# EAGLE board J005904_miniBCS-4 (EAGLE 7.7.0), part 1 of 2
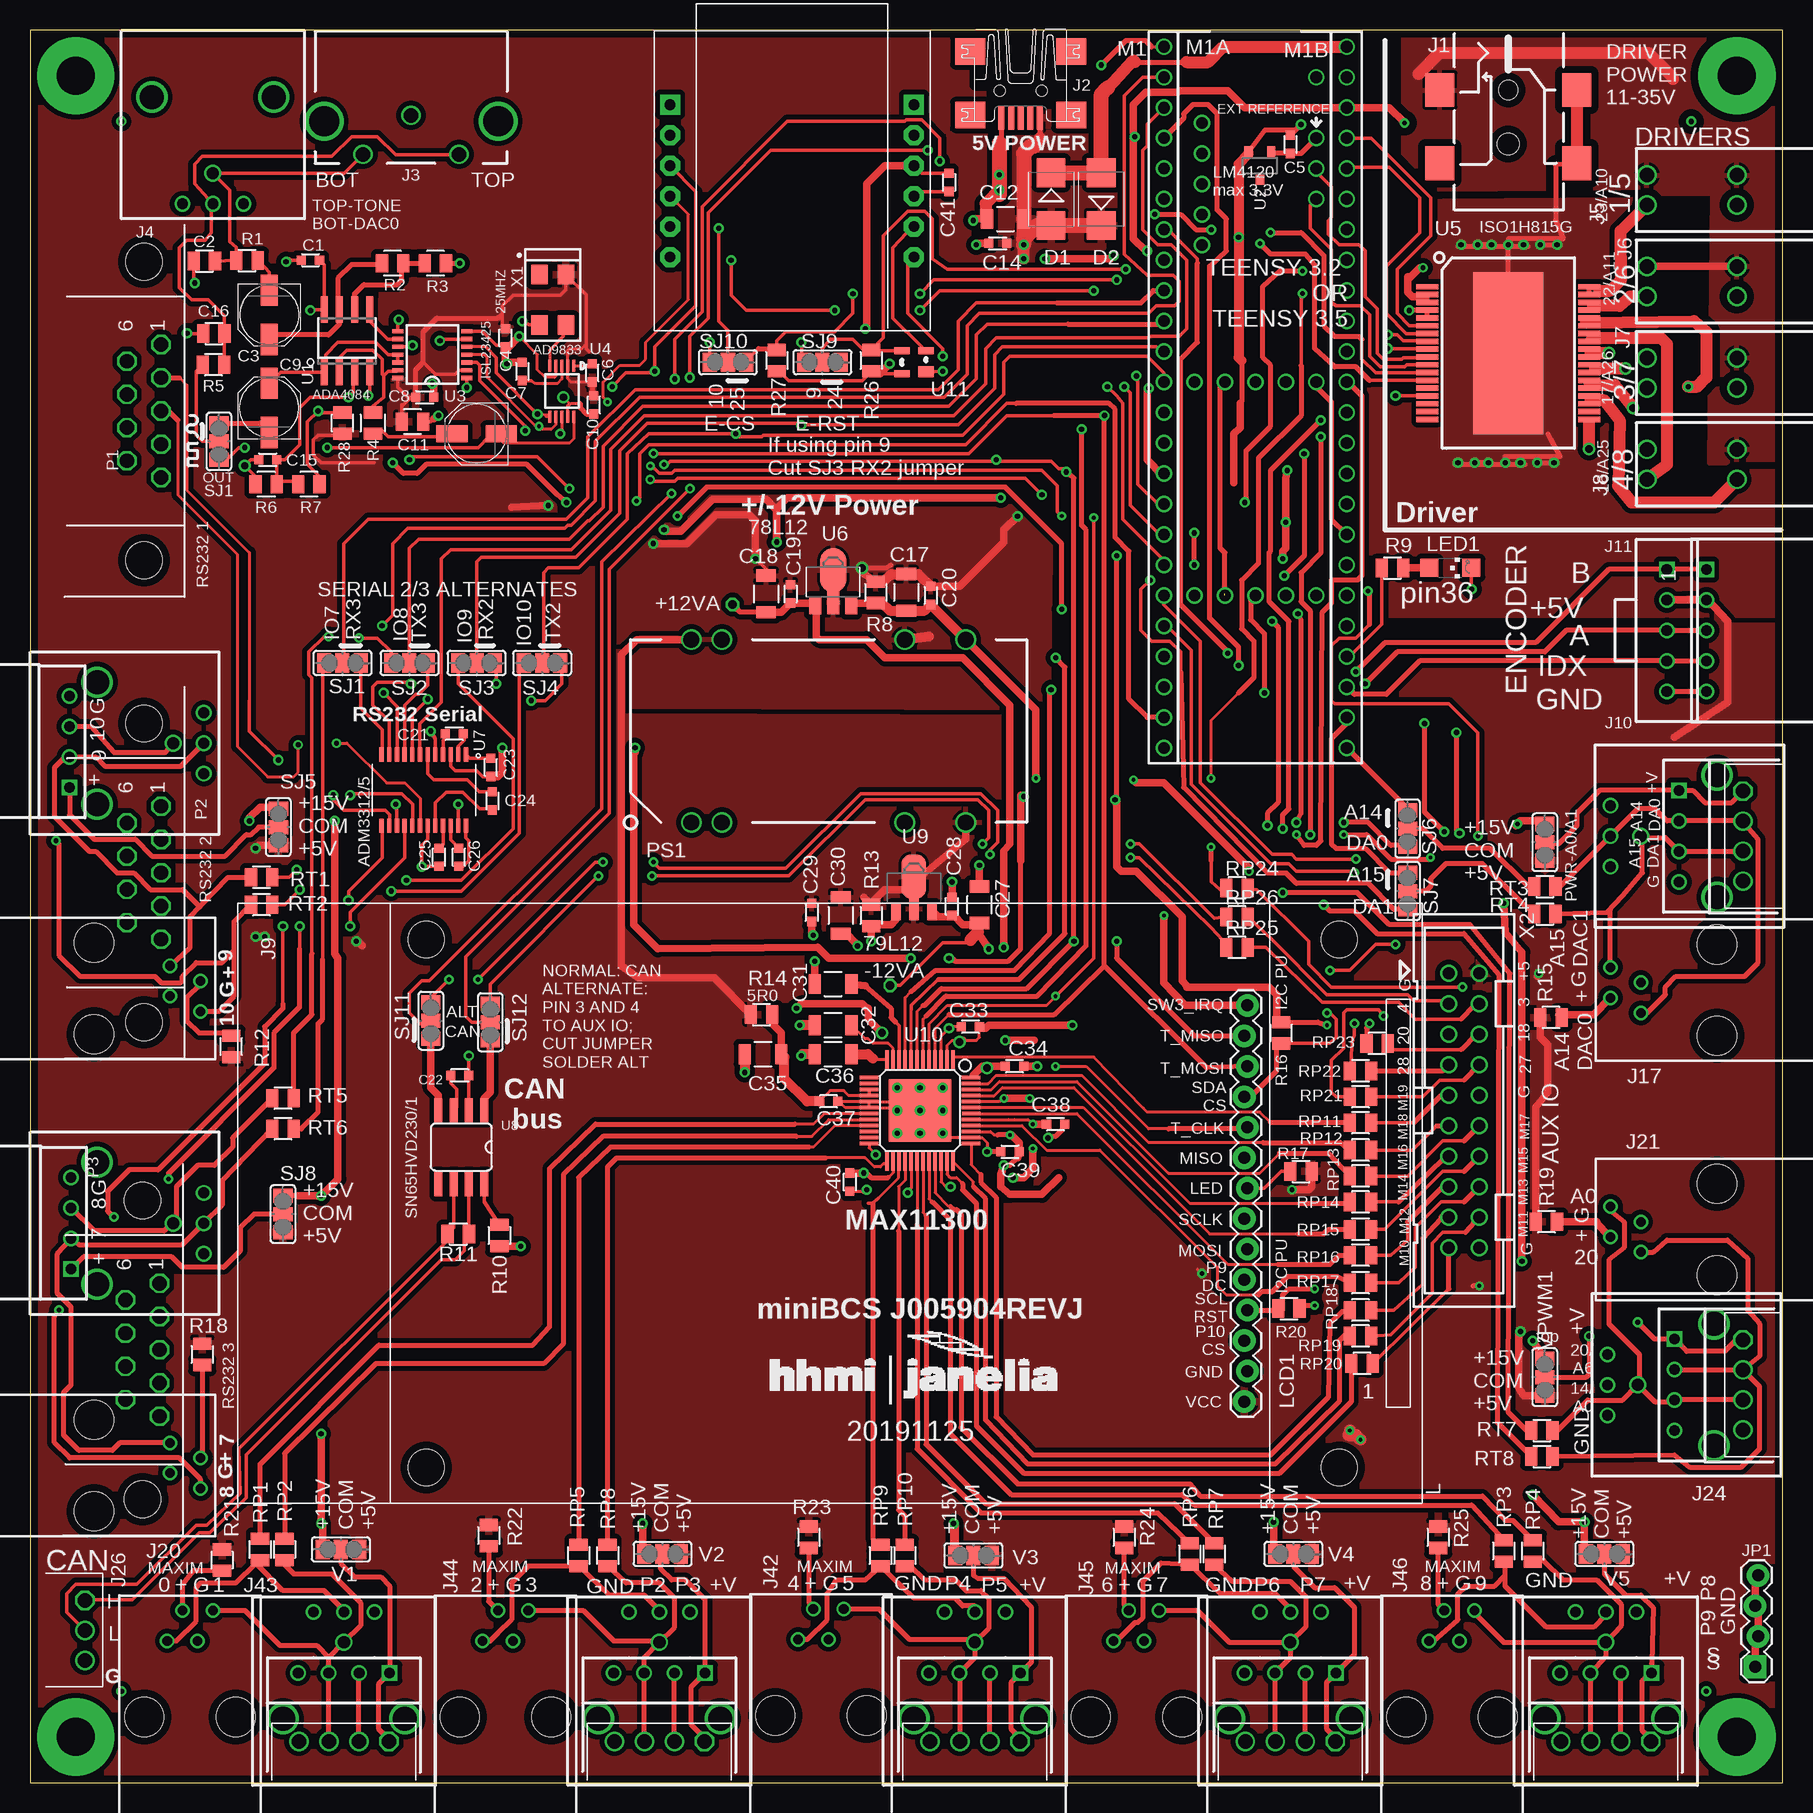
[diagram p0: board, top side]
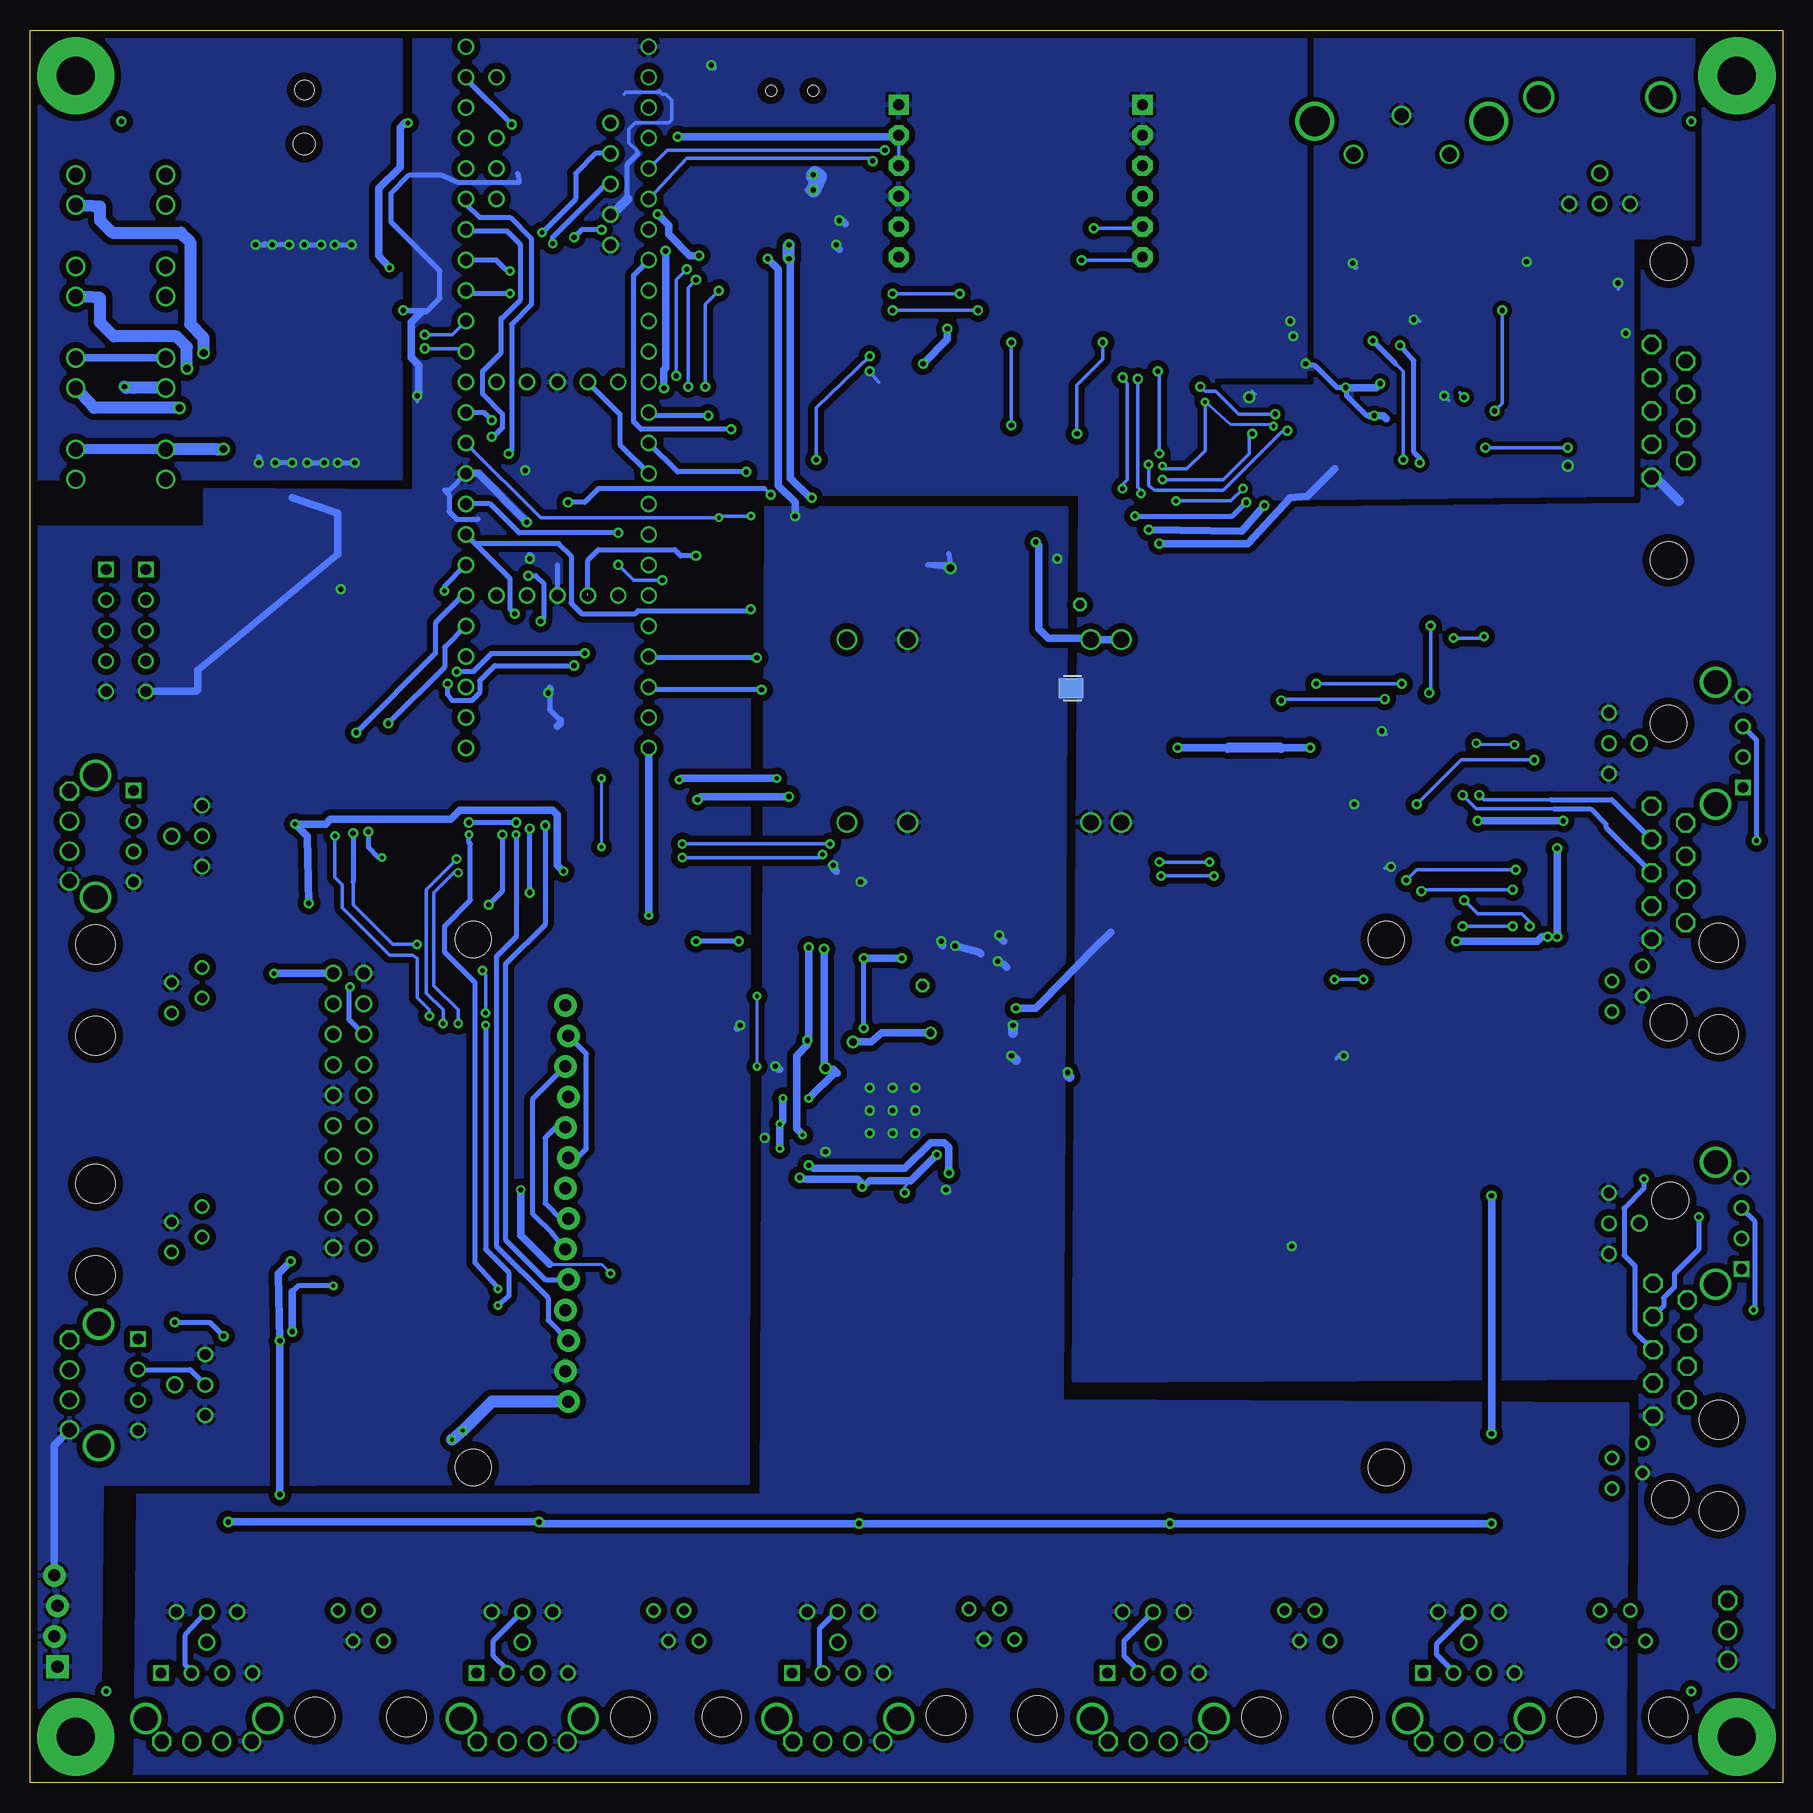
[diagram p1: board, bottom side, seen from below]

Size 146.05 x 146.05 mm. Coordinates in mm from the lower left corner, seen from the top.
Outline: 0,0 146.05,0 146.05,146.05 0,146.05 0,0
Copper layers (1*16): Top 0.035mm / dielectric 1.5mm / Bottom 0.035mm
Design rules "default *": minimum track width 8mil, minimum drill 12mil, track to track 8mil, track to pad 7mil, pad to pad 7mil, via to via 8mil, smd to smd 7mil, copper to edge 25mil, drill to drill 8mil, minimum pad ring 8mil, minimum via ring 8mil, stop-mask expansion 4mil, vias tented up to drill 25mil, thermal gap 10mil
Net classes: 1 power: width 0.254 mm

## Footprints (pad centres in the part's own frame; a part is rotated, then mirrored left to right if it is on the bottom)
0603S = smd 0.762 x 0.762: 1 -0.762,0; 2 0.762,0
0805S = smd 1.016 x 1.524: 1 -0.889,0; 2 0.889,0
PANASONIC_C = smd 2.6 x 1.4: + 2.05,0; - -2.05,0
1206S = smd 1.016 x 1.651: 1 -1.524,0; 2 1.524,0
SMB = smd 2.4 x 2.4: A 2.2,0; C -2.2,0
FIDUCIAL_VIA = drill 0.432: P$1 0,0
WIZ820IO = drill 0.9 pad 1.676 square: J1.1 -10.16,6.35; J2.1 10.16,6.35 | drill 0.9 pad 1.676 octagon: J1.2 -10.16,3.81; J1.3 -10.16,1.27; J1.4 -10.16,-1.27; J1.5 -10.16,-3.81; J1.6 -10.16,-6.35; J2.2 10.16,3.81; J2.3 10.16,1.27; J2.4 10.16,-1.27; J2.5 10.16,-3.81; J2.6 10.16,-6.35
PJ-002 = smd 2.8 x 2.4: 1A 5,5.7; 1B 11.1,5.7; 2 5,-5.7; 3 11.1,-5.7 | hole 1.6: 5,0 | hole 1.8: 9.5,0
UX60-MB-5ST = smd 2 x 0.5: 1 2.25,1.6; 2 2.25,0.8; 3 2.25,0; 4 2.25,-0.8; 5 2.25,-1.6 | smd 2.2 x 2.5: M1 -3.3,-4.2; M2 -3.3,4.2; M3 2,4.2; M4 2,-4.2 | hole 0.9: 0,-1.75; 0,1.75
RCJ-22XX = drill 1.2: 1 0,0; 2 -4,-3.25; 3 4,-3.25 | drill 2.5: A -7.25,-0.5; B 7.25,-0.5
DUAL-BNC = drill 1.016: P$1 0,0 | drill 0.889: P$2 2.54,0; P$3 2.54,2.54; P$4 2.54,-2.54 | drill 2.007: P$5 -6.35,5.08; P$6 -6.35,-5.08
1894804 = drill 1.2: 1 -1.25,0; 2 1.25,0; 3 -1.25,7.5; 4 1.25,7.5
0432024101 = drill 0.8: 1 -1.9,14.35; 2 -0.64,16.89; 3 0.63,14.35; 4 1.9,16.89 | hole 3.25: -3.81,8; 3.81,8
AMPMODU-5 = drill 0.889 square: 1 -5.08,0 | drill 0.889: 2 -2.54,0; 3 0,0; 4 2.54,0; 5 5.08,0
103635-4 = drill 0.889 square: 1 -5.08,0 | drill 0.889: 2 -2.54,0; 3 0,0; 4 2.54,0; 5 5.08,0
AMPMODU-4-RA = drill 0.889 square: 1 -3.81,0 | drill 0.889: 2 -1.27,0; 3 1.27,0; 4 3.81,0
PHOENIX_1881464 = drill 1.2 octagon: 1 3.75,0 | drill 1.2: 2 1.25,0; 3 -1.25,0; 4 -3.75,0
PHOENIX_1881451 = drill 1.2 octagon: 1 -2.48,0 | drill 1.2: 2 0.02,0; 3 2.52,0
JUMPER = smd 1.016 x 1.651: 1 -0.635,0; 2 0.381,0
1X04_LOCK = drill 1.016 pad 1.88 square: 1 0,0.127 | drill 1.016 pad 1.88: 2 2.54,-0.127; 3 5.08,0.127; 4 7.62,-0.127
ILI9341TFT_HOLES = hole 3: -36.08,-22; -36.08,22; 40,22; 40,-22
TFT_LCD_NOHOLES = drill 1.016 pad 1.88: 1 -40.863,16.51; 2 -41.117,13.97; 3 -40.863,11.43; 4 -41.117,8.89; 5 -40.863,6.35; 6 -41.117,3.81; 7 -40.863,1.27; 8 -41.117,-1.27; 9 -40.863,-3.81; 10 -41.117,-6.35; 11 -40.863,-8.89; 12 -41.117,-11.43; 13 -40.863,-13.97; 14 -41.117,-16.51
CHIPLED_1206 = smd 1.5 x 1.5: A 0,-1.75; C 0,1.75
TEENSY_3.X = drill 0.965: 0 -7.62,27.94; 1 -7.62,25.4; 2 -7.62,22.86; 3 -7.62,20.32; 3.3V 7.62,25.4; 3.3V3 -7.62,-5.08; 3.3V4 -2.54,-15.24; 3.3V_32 -2.54,2.54; 4 -7.62,17.78; 5 -7.62,15.24; 6 -7.62,12.7; 7 -7.62,10.16; 8 -7.62,7.62; 9 -7.62,5.08; 10 -7.62,2.54; 11 -7.62,0; 12 -7.62,-2.54; 13 7.62,-2.54; 14/A0 7.62,0; 15/A1 7.62,2.54; 16/A2 7.62,5.08; 17/A3 7.62,7.62; 18/A4 7.62,10.16; 19/A5 7.62,12.7; 20/A6 7.62,15.24; 21/A7 7.62,17.78; 22/A8 7.62,20.32; 23/A9 7.62,22.86; 24 -7.62,-7.62; 25 -7.62,-10.16; 26 -7.62,-12.7; 27 -7.62,-15.24; 28 -7.62,-17.78; 29 -7.62,-20.32; 30 -7.62,-22.86; 31/A12 -7.62,-25.4; 32/A13 -7.62,-27.94; 33/A14 7.62,-27.94; 34/A15 7.62,-25.4; 35/A16 7.62,-22.86; 36/A17 7.62,-20.32; 37/A18 7.62,-17.78; 38/A19 7.62,-15.24; 39/A20 7.62,-12.7; A10 5.08,20.32; A11 5.08,17.78; A14/DAC_32 5.08,2.54; A21 7.62,-10.16; A22 7.62,-7.62; A25 -4.445,19.05; A26 -4.445,21.59; AGND 7.62,27.94; AREF 5.08,22.86; GND -7.62,30.48; GND1 7.62,-5.08; GND3 -4.445,16.51; GND4 -4.445,13.97; GND6 0,-15.24; GND_32 0,2.54; NC -4.445,24.13; PGM 2.54,-15.24; PGM_32 2.54,2.54; RESET 5.08,-15.24; VBAT -5.08,-15.24; VBAT_32 -5.08,2.54; VIN 7.62,30.48; VUSB 5.08,27.94
SJ_2 = smd 1.168 x 1.6: 1 -1.524,0; 2 0,0; 3 1.524,0
182-009-MALE = drill 1.194 pad 1.524 octagon: 1 -5.537,10.923; 2 -2.769,10.923; 3 0,10.923; 4 2.769,10.923; 5 5.537,10.923; 6 -4.153,8.08; 7 -1.384,8.08; 8 1.384,8.08; 9 4.153,8.08 | hole 3.048: -12.446,9.501; 12.446,9.501
NDTD = drill 1.321: 2 -10.16,-7.62; 3 -7.62,-7.62; 9 7.62,-7.62; 11 12.7,-7.62; 14 12.7,7.62; 16 7.62,7.62; 22 -7.62,7.62; 23 -10.16,7.62
SO8 = smd 0.6 x 2.2: 1 -1.905,-2.6; 2 -0.635,-2.6; 3 0.635,-2.6; 4 1.905,-2.6; 5 1.905,2.6; 6 0.635,2.6; 7 -0.635,2.6; 8 -1.905,2.6
DBZ_R-PDSO-G3 = smd 0.7 x 1: 1 -0.95,-1.1; 2 0.95,-1.1; 3 0,1.1
TSSOP14 = smd 0.9 x 0.35: 1 -2.875,1.95; 2 -2.875,1.3; 3 -2.875,0.65; 4 -2.875,0; 5 -2.875,-0.65; 6 -2.875,-1.3; 7 -2.875,-1.95; 8 2.875,-1.95; 9 2.875,-1.3; 10 2.875,-0.65; 11 2.875,0; 12 2.875,0.65; 13 2.875,1.3; 14 2.875,1.95
MSOP10 = smd 0.25 x 1: 1 -1,-2.113; 2 -0.5,-2.113; 3 0,-2.113; 4 0.5,-2.113; 5 1,-2.113; 6 1,2.113; 7 0.5,2.113; 8 0,2.113; 9 -0.5,2.113; 10 -1,2.113
PG-DSO-36 = smd 1.83 x 0.45: 1 -6.74,5.525; 2 -6.74,4.875; 3 -6.74,4.225; 4 -6.74,3.575; 5 -6.74,2.925; 6 -6.74,2.275; 7 -6.74,1.625; 8 -6.74,0.975; 9 -6.74,0.325; 10 -6.74,-0.325; 11 -6.74,-0.975; 12 -6.74,-1.625; 13 -6.74,-2.275; 14 -6.74,-2.925; 15 -6.74,-3.575; 16 -6.74,-4.225; 17 -6.74,-4.875; 18 -6.74,-5.525; 19 6.74,-5.525; 20 6.74,-4.875; 21 6.74,-4.225; 22 6.74,-3.575; 23 6.74,-2.925; 24 6.74,-2.275; 25 6.74,-1.625; 26 6.74,-0.975; 27 6.74,-0.325; 28 6.74,0.325; 29 6.74,0.975; 30 6.74,1.625; 31 6.74,2.275; 32 6.74,2.925; 33 6.74,3.575; 34 6.74,4.225; 35 6.74,4.875; 36 6.74,5.525 | smd 5.8 x 13.5: P$1 0,0
SOT89 = smd 1 x 1.5: 1 -1.499,-1.981; 3 1.499,-1.981 | smd 1 x 2: 2 0,-1.727 | smd 2.2 x 3.7: 2@1 0,0.94
TSSOP-24 = smd 0.356 x 1.194: 1 -3.52,-2.96; 2 -2.88,-2.96; 3 -2.24,-2.96; 4 -1.6,-2.96; 5 -0.96,-2.96; 6 -0.32,-2.96; 7 0.32,-2.96; 8 0.96,-2.96; 9 1.6,-2.96; 10 2.24,-2.96; 11 2.88,-2.96; 12 3.52,-2.96; 13 3.52,2.96; 14 2.88,2.96; 15 2.24,2.96; 16 1.6,2.96; 17 0.96,2.96; 18 0.32,2.96; 19 -0.32,2.96; 20 -0.96,2.96; 21 -1.6,2.96; 22 -2.24,2.96; 23 -2.88,2.96; 24 -3.52,2.96
SO8' = smd 0.66 x 2.032: 1 -1.905,-3.073; 2 -0.635,-3.073; 3 0.635,-3.073; 4 1.905,-3.073; 5 1.905,3.073; 6 0.635,3.073; 7 -0.635,3.073; 8 -1.905,3.073
SOT89' = smd 0.8 x 1.4: 1 -1.499,-1.981; 3 1.499,-1.981 | smd 0.8 x 1.9: 2 0,-1.727 | smd 2.032 x 3.65: 2@1 0,0.94
TQFP48 = smd 0.27 x 1.55: 1 -2.75,-4.25; 2 -2.25,-4.25; 3 -1.75,-4.25; 4 -1.25,-4.25; 5 -0.75,-4.25; 6 -0.25,-4.25; 7 0.25,-4.25; 8 0.75,-4.25; 9 1.25,-4.25; 10 1.75,-4.25; 11 2.25,-4.25; 12 2.75,-4.25; 25 2.75,4.25; 26 2.25,4.25; 27 1.75,4.25; 28 1.25,4.25; 29 0.75,4.25; 30 0.25,4.25; 31 -0.25,4.25; 32 -0.75,4.25; 33 -1.25,4.25; 34 -1.75,4.25; 35 -2.25,4.25; 36 -2.75,4.25 | smd 1.55 x 0.27: 13 4.25,-2.75; 14 4.25,-2.25; 15 4.25,-1.75; 16 4.25,-1.25; 17 4.25,-0.75; 18 4.25,-0.25; 19 4.25,0.25; 20 4.25,0.75; 21 4.25,1.25; 22 4.25,1.75; 23 4.25,2.25; 24 4.25,2.75; 37 -4.25,2.75; 38 -4.25,2.25; 39 -4.25,1.75; 40 -4.25,1.25; 41 -4.25,0.75; 43 -4.25,-0.25; 44 -4.25,-0.75; 45 -4.25,-1.25; 46 -4.25,-1.75; 47 -4.25,-2.25; 48 -4.25,-2.75 | smd 1.5 x 0.3: 42 -4.25,0.25 | smd 5.22 x 5.22: P$1 0,0
SOT-143 = smd 0.94 x 1.31: 1 -0.79,-1 | smd 0.55 x 1.31: 2 0.96,-1; 3 0.96,1; 4 -0.96,1
5.2X3.4-4-PAD = smd 1.6 x 1.4: 1 -2.1,-1.1; 2 2.1,-1.1; 3 2.1,1.1; 4 -2.1,1.1
PAK100/2500-20 = drill 1 pad 1.422: 1 -11.43,-1.27; 2 -11.43,1.27; 3 -8.89,-1.27; 4 -8.89,1.27; 5 -6.35,-1.27; 6 -6.35,1.27; 7 -3.81,-1.27; 8 -3.81,1.27; 9 -1.27,-1.27; 10 -1.27,1.27; 11 1.27,-1.27; 12 1.27,1.27; 13 3.81,-1.27; 14 3.81,1.27; 15 6.35,-1.27; 16 6.35,1.27; 17 8.89,-1.27; 18 8.89,1.27; 19 11.43,-1.27; 20 11.43,1.27

## Placement (x,y rotation side)
C1  0.1  [0603S]  23.37,126.87 180 top
C2  0.1  [0805S]  14.53,126.8 180 top
C3  [PANASONIC_C]  19.94,122.3 270 top
C4  0.1  [0603S]  39.62,120.4 270 top
C5  .1uF  [0603S]  105.03,136.53 90 top
C6  0.1  [0603S]  46.86,117.47 270 top
C7  0.1  [0603S]  41.02,117.6 90 top
C8  0.1  [0603S]  32.89,115.44 180 top
C9  [PANASONIC_C]  19.94,114.55 90 top
C10  0.1  [0603S]  46.99,114.81 270 top
C11  1  [0805S]  31.88,113.41 0 top
C12  10  [1206S]  81.28,130.3 180 top
C13  [PANASONIC_C]  37.21,112.39 180 top
C14  0.1  [0603S]  80.64,128.27 180 top
C15  0.1  [0603S]  19.81,110.24 180 top
C16  0.1  [0805S]  15.32,120.75 180 top
C17  10  [1206S]  73.03,99.19 90 top
C18  10  [1206S]  61.34,99.06 90 top
C19  0.1  [0603S]  63.37,99.06 90 top
C20  0.1  [0603S]  75.06,98.93 90 top
C21  0.1  [0603S]  35.36,87.4 0 top
C22  .1uF  [0603S]  35.81,58.93 0 top
C23  0.1  [0603S]  38.4,84.61 270 top
C24  0.1  [0603S]  38.53,81.81 90 top
C25  0.1  [0603S]  34.09,77.11 270 top
C26  0.1  [0603S]  35.74,77.11 270 top
C27  10  [1206S]  79.12,73.15 270 top
C28  0.1  [0603S]  76.83,73.03 270 top
C29  0.1  [0603S]  65.15,72.52 90 top
C30  10  [1206S]  67.56,72.26 90 top
C31  10  [1206S]  66.93,66.55 180 top
C32  10  [1206S]  66.93,63.12 180 top
C33  0.1  [0603S]  78.36,62.99 0 top
C34  0.1  [0603S]  82.04,59.69 0 top
C35  10uF  [1206S]  61.09,60.71 180 top
C36  10  [1206S]  66.93,60.71 180 top
C37  0.1  [0603S]  66.55,56.77 0 top
C38  0.1  [0603S]  85.47,54.86 0 top
C39  0.1  [0603S]  81.66,52.58 180 top
C40  0.1  [0603S]  68.33,50.04 270 top
C41  .1uF  [0603S]  76.58,133.35 90 top
D1  [SMB]  85.09,131.95 270 top
D2  [SMB]  89.28,131.95 90 top
FID1  FIDUCIAL_VIA  [FIDUCIAL_VIA]  7.62,138.43 0 top
FID2  FIDUCIAL_VIA  [FIDUCIAL_VIA]  138.43,138.43 0 top
FID3  FIDUCIAL_VIA  [FIDUCIAL_VIA]  7.62,7.62 0 top
FID4  FIDUCIAL_VIA  [FIDUCIAL_VIA]  139.7,7.62 0 top
IC1  [WIZ820IO]  63.5,133.48 0 top
J1  [PJ-002]  123.19,146.05 270 top
J2  UX60-MB-5ST  [UX60-MB-5ST]  82.55,140.97 270 top
J3  RCA_DUAL  [RCJ-22XX]  31.75,138.94 0 top
J4  [DUAL-BNC]  15.24,134.11 270 top
J5  [1894804]  142.24,132.72 90 top
J6  [1894804]  142.24,125.09 90 top
J7  [1894804]  142.24,117.47 90 top
J8  [1894804]  142.24,109.86 90 top
J9  [0432024101]  -2.67,66.17 270 top
J10  [AMPMODU-5]  136.4,96.01 270 top
J11  [103635-4]  139.7,96.01 270 top
J12  [AMPMODU-4-RA]  3.3,86.74 90 top
J13  [DUAL-BNC]  11.94,86.61 0 top
J14  A0/A1  [DUAL-BNC]  134.24,78.87 180 top
J15  [AMPMODU-4-RA]  137.41,78.87 270 top
J16  [PHOENIX_1881464]  142.75,78.87 90 top
J17  [0432024101]  148.59,66.04 90 top
J18  [AMPMODU-4-RA]  3.43,46.61 90 top
J19  [DUAL-BNC]  11.94,46.61 0 top
J20  [0432024101]  -2.67,26.42 270 top
J21  [0432024101]  148.59,46.1 90 top
J22  [DUAL-BNC]  133.99,33.15 180 top
J23  [AMPMODU-4-RA]  137.03,33.15 270 top
J24  [PHOENIX_1881464]  142.75,33.15 90 top
J26  [PHOENIX_1881451]  4.57,12.7 270 top
J27  [DUAL-BNC]  131.32,11.68 90 top
J28  [DUAL-BNC]  26.16,11.68 90 top
J29  [DUAL-BNC]  52.45,11.68 90 top
J30  [DUAL-BNC]  78.74,11.68 90 top
J31  [DUAL-BNC]  105.03,11.68 90 top
J32  [AMPMODU-4-RA]  131.32,9.14 180 top
J33  [AMPMODU-4-RA]  26.16,9.14 180 top
J34  [AMPMODU-4-RA]  52.45,9.14 180 top
J35  [AMPMODU-4-RA]  78.74,9.14 180 top
J36  [AMPMODU-4-RA]  105.03,9.14 180 top
J37  [PHOENIX_1881464]  131.32,3.43 0 top
J38  [PHOENIX_1881464]  26.16,3.43 0 top
J39  [PHOENIX_1881464]  52.45,3.43 0 top
J40  [PHOENIX_1881464]  78.74,3.43 0 top
J41  [PHOENIX_1881464]  105.03,3.43 0 top
J42  [0432024101]  65.91,-2.41 0 top
J43  [0432024101]  13.34,-2.54 0 top
J44  [0432024101]  39.62,-2.54 0 top
J45  [0432024101]  92.2,-2.54 0 top
J46  [0432024101]  118.49,-2.54 0 top
JMP100  JUMPER  [JUMPER]  59.18,91.19 0 bottom
JP1  [1X04_LOCK]  143.89,9.65 90 top
L  ILI9341TFT_FP  [ILI9341TFT_HOLES]  73.03,48.26 180 top
LCD1  TFT_LCDTFT_NOHOLES  [TFT_LCD_NOHOLES]  60.33,48.26 180 top
LED1  [CHIPLED_1206]  118.36,101.22 270 top
M1  TEENSY_3_5_2  [TEENSY_3.X]  102.11,114.17 0 top
OUT  SJ1  [SJ_2]  15.75,111.76 90 top
P1  [182-009-MALE]  0,114.3 270 top
P2  [182-009-MALE]  0,75.82 270 top
P3  [182-009-MALE]  -0.13,36.07 270 top
PS1  [NDTD]  65.28,87.63 0 top
PWR-A0/A1  [SJ_2]  126.24,78.36 90 top
R1  100  [0805S]  18.08,126.85 180 top
R2  4K99  [0805S]  30.23,126.62 180 top
R3  10K0  [0805S]  33.78,126.62 0 top
R4  1250  [0805S]  28.57,113.28 90 top
R5  100  [0805S]  15.29,118.16 0 top
R6  4K99  [0805S]  19.68,108.2 0 top
R7  4K99  [0805S]  23.24,108.2 0 top
R8  2K70  [0805S]  70.48,99.19 90 top
R9  100  [0805S]  113.54,101.22 180 top
R10  118  [0805S]  39.12,45.59 90 top
R11  118  [0805S]  35.69,45.72 180 top
R12  118  [0805S]  16.76,61.34 270 top
R13  2K70  [0805S]  70.1,72.26 90 top
R14  4R99  [0805S]  60.96,64.01 180 top
R15  118  [0805S]  126.75,63.75 0 top
R16  10K0  [0805S]  104.27,62.48 270 top
R17  100  [0805S]  105.92,50.93 180 top
R18  118  [0805S]  14.35,35.69 90 top
R19  118  [0805S]  126.36,46.74 0 top
R20  10K0  [0805S]  104.9,39.5 180 top
R21  100  [0805S]  16,18.54 90 top
R22  100  [0805S]  38.23,20.57 90 top
R23  100  [0805S]  64.9,20.45 90 top
R24  100  [0805S]  91.19,20.45 90 top
R25  100  [0805S]  117.35,20.45 90 top
R26  10K0  [0805S]  70.1,118.49 90 top
R27  10K0  [0805S]  62.23,118.49 90 top
R28  4R99  [0805S]  26.04,113.28 270 top
RP1  100  [0805S]  19.18,19.43 90 top
RP2  100  [0805S]  21.21,19.43 90 top
RP3  100  [0805S]  122.81,19.3 90 top
RP4  100  [0805S]  125.22,19.3 90 top
RP5  100  [0805S]  45.72,18.92 90 top
RP6  100  [0805S]  96.65,19.05 90 top
RP7  100  [0805S]  98.68,19.05 90 top
RP8  100  [0805S]  48.13,18.92 90 top
RP9  100  [0805S]  70.87,18.92 90 top
RP10  100  [0805S]  72.9,18.92 90 top
RP11  100  [0805S]  110.87,54.99 0 top
RP12  100  [0805S]  110.87,52.7 0 top
RP13  100  [0805S]  110.87,50.55 0 top
RP14  100  [0805S]  110.87,48.39 0 top
RP15  100  [0805S]  110.87,46.1 0 top
RP16  100  [0805S]  110.87,43.94 0 top
RP17  100  [0805S]  110.87,41.66 0 top
RP18  100  [0805S]  110.87,39.37 0 top
RP19  100  [0805S]  110.87,37.21 0 top
RP20  100  [0805S]  111,34.92 0 top
RP21  100  [0805S]  110.87,57.15 0 top
RP22  100  [0805S]  110.87,59.31 0 top
RP23  100  [0805S]  112.27,61.59 0 top
RP24  100  [0805S]  100.58,74.55 0 top
RP25  100  [0805S]  100.58,69.6 0 top
RP26  100  [0805S]  100.58,72.14 0 top
RT1  100  [0805S]  19.3,75.44 0 top
RT2  100  [0805S]  19.3,73.15 0 top
RT3  100  [0805S]  126.24,74.68 180 top
RT4  100  [0805S]  126.24,72.39 180 top
RT5  100  [0805S]  21.08,57.02 0 top
RT6  100  [0805S]  21.08,54.48 0 top
RT7  100  [0805S]  125.98,29.34 180 top
RT8  100  [0805S]  125.98,27.18 180 top
SJ1  [SJ_2]  26.04,93.29 180 top
SJ2  [SJ_2]  31.62,93.29 180 top
SJ3  [SJ_2]  37.21,93.29 180 top
SJ4  [SJ_2]  42.67,93.29 180 top
SJ5  [SJ_2]  20.7,79.63 90 top
SJ6  [SJ_2]  114.81,79.5 90 top
SJ7  [SJ_2]  114.81,74.3 90 top
SJ8  [SJ_2]  21.08,47.37 90 top
SJ9  [SJ_2]  66.04,118.36 0 top
SJ10  [SJ_2]  58.17,118.36 0 top
SJ11  [SJ_2]  33.4,63.5 270 top
SJ12  [SJ_2]  38.35,63.37 270 top
U1  ADA4084  [SO8]  26.42,120.14 0 top
U2  LM4120  [DBZ_R-PDSO-G3]  102.49,134.75 180 top
U3  ISL23425  [TSSOP14]  33.53,119 180 top
U4  AD9833  [MSOP10]  44.32,115.95 180 top
U5  ISO1H815G  [PG-DSO-36]  123.19,119.13 0 top
U6  78L12  [SOT89]  66.93,100.08 0 top
U7  ADM3312/5  [TSSOP-24]  32.82,82.7 180 top
U8  SN65HVD230/1  [SO8']  35.94,52.96 180 top
U9  79L12  [SOT89']  73.66,74.55 0 top
U10  MAX11300GCM  [TQFP48]  74.17,56.01 180 top
U11  CAT811  [SOT-143]  73.66,118.36 90 top
U$1  JFRC-LOGOLOGO_2014_DOC  [LOGO_JANELIA_2014_DOC]  28.7,94.56 0 top
V1  [SJ_2]  25.91,19.43 180 top
V2  [SJ_2]  52.7,19.05 180 top
V3  [SJ_2]  78.61,18.92 180 top
V4  [SJ_2]  105.28,19.05 180 top
V5  [SJ_2]  131.19,19.05 180 top
VPWM1  [SJ_2]  126.24,33.78 90 top
X1  OSC-OE-CFPS-9  [5.2X3.4-4-PAD]  43.56,123.57 270 top
X2  2520-  [PAK100/2500-20]  119.51,56.01 270 top

## Library data of the parts
C1 C4 C6-C8 C10 C11 C15 C21 C23-C26 FID1-FID4 J1 J3-J24 J26-J46 JMP100 L LCD1 PS1 R2-R4 R6 R7 U3-U5 U7 U11 U$1 = STEVES_BU
C2 C5 C12 C14 C16-C20 C22 C27-C41 R1 R5 R8-R28 RP1-RP26 RT1-RT8 = SteveS
C3 C9 C13 = rcl
D1 D2 = diode
IC1 = Wiz820io
J2 = STEVES_BU; OC_FARNELL: unknown; OC_NEWARK: unknown
JP1 = SparkFun
LED1 = adafruit
M1 = Teensy_3_and_LC_Series_Boards_v1.4
OUT PWR-A0/A1 SJ1-SJ12 V1-V5 VPWM1 = jumper
P1-P3 = con-subd; OC_FARNELL: unknown; OC_NEWARK: unknown
U1 = analog-devices; MF: ALTERA CORPORATION; MPN: AD712KRZ; OC_FARNELL: 1263975; OC_NEWARK: 59K4556
U2 = texas; MPN: LM4041A12IDBZR; OC_FARNELL: 1407949; OC_NEWARK: 58K5875
U6 = linear
U8 = Teaxs_Instruments
U9 = jfrc
U10 = MAX11300
X1 = IQD-Frequency-Products
X2 = con-3m; OC_FARNELL: unknown; OC_NEWARK: unknown

## Nets
0.1: C22.1 U8.3
!CS_DDS: M1.19/A5 U4.8
!CS_POT: M1.31/A12 U3.6
!MAX_CS: M1.6 U10.6
!MAXCNVT: M1.30 U10.9
!MAXINT: M1.29 U10.8
!TFT_CS: LCD1.3 M1.15/A1
+2V5A: C15.1 R6.2 R7.1 U1.3
+3V3D: C23.2 C33.1 C41.2 IC1.J2.2 IC1.J2.3 M1.3.3V M1.3.3V3 M1.3.3V4 M1.3.3V_32 R16.1 R20.1 R26.1 R27.1 U5.2 U5.3 U7.3 U10.3 U11.4
+5VA: C35.1 C37.1 R14.1 U10.15 U10.16
+5VADDS: C1.1 R7.2 R28.1 U1.8
+5VD: C4.1 C6.2 C8.2 C10.1 C11.1 C12.1 C14.1 D1.A D2.C J2.1 J10.2 J11.2 LCD1.1 PS1.22 PS1.23 PWR-A0/A1.1 R12.2 R14.2 R15.1 R17.1 R18.2 R19.1 R21.2 R22.2 R23.2 R24.2 R25.2 R28.2 SJ5.1 SJ8.1 U3.2 U3.14 U4.2 V1.1 V2.1 V3.1 V4.1 V5.1 VPWM1.1 X1.4 X2.2
+12VA: C18.1 C19.1 C39.1 C40.1 U6.1 U10.26 U10.39
+15V: C17.1 C20.1 PS1.14 PWR-A0/A1.3 R8.1 SJ5.3 SJ8.3 U6.3 V1.3 V2.3 V3.3 V4.3 V5.3 VPWM1.3
-12VA: C27.2 C28.2 C34.1 C38.1 U9.3 U10.24 U10.29 U10.34 U10.41 U10.44 U10.48
-15V: C29.2 C30.2 PS1.11 R13.2 U9.2 U9.2@1
A0: M1.14/A0 RT7.2
A14: M1.33/A14 RT3.2 SJ6.2 SJ6.3
A15: M1.34/A15 RT4.2 SJ7.2 SJ7.3
AGND: C1.2 C2.2 C5.2 C10.2 C15.2 C16.2 C17.2 C18.2 C19.2 C20.2 C27.1 C28.1 C29.1 C30.1 C31.2 C32.2 C34.2 C35.2 C36.2 C37.2 C38.2 C39.2 C40.2 J3.1 J4.P$3 J4.P$4 J27.P$3 J27.P$4 J28.P$3 J28.P$4 J29.P$3 J29.P$4 J30.P$3 J30.P$4 J31.P$3 J31.P$4 J32.4 J33.4 J34.4 J35.4 J36.4 J37.4 J38.4 J39.4 J40.4 J41.4 J42.3 J43.3 J44.3 J45.3 J46.3 JMP100.1 M1.AGND PS1.9 PS1.16 R3.2 R6.1 R8.2 R13.1 U1.4 U2.2 U3.8 U4.9 U6.2 U6.2@1 U9.1 U10.17 U10.18 U10.38 U10.P$1
AREF: C5.1 M1.AREF U2.1
CANH: J26.1 R11.1 U8.7
CANL: J26.2 R11.2 U8.6
CANRX: M1.4 SJ11.2 SJ11.3 U8.4
CANTX: M1.3 SJ12.2 SJ12.3 U8.1
DAC0: M1.A14/DAC_32 M1.A21 SJ6.1 U3.10
DAC0_OUT: C2.1 J3.2 J4.P$1 R1.2
DAC1: M1.A22 SJ7.1
DAC_REF: C36.1 U10.12
DDS: C13.- OUT.1 U4.10
DDS_OUT: C16.1 J3.3 J4.P$2 R5.2
DGND: C4.2 C7.2 C8.1 C11.2 C12.2 C14.2 C22.2 C25.2 C33.2 C41.1 IC1.J1.1 IC1.J1.2 IC1.J2.1 IC1.J2.4 J2.5 J9.3 J10.5 J11.5 J12.4 J13.P$3 J13.P$4 J14.P$3 J14.P$4 J15.4 J16.4 J17.3 J18.4 J19.P$3 J19.P$4 J20.3 J21.3 J22.P$3 J22.P$4 J23.4 J24.4 J26.3 JMP100.2 JP1.1 JP1.2 JP1.3 JP1.4 LCD1.2 LED1.C M1.GND M1.GND1 M1.GND3 M1.GND4 M1.GND6 M1.GND_32 P1.5 P2.5 P3.5 PS1.2 PS1.3 R10.1 U3.1 U3.7 U4.4 U5.4 U5.5 U5.15 U7.5 U7.19 U7.23 U8.2 U10.2 U11.1 X1.2 X2.1 X2.10 X2.20
EA: J28.P$2 J33.2 J38.2 J43.1 RP1.1
EA1: J29.P$2 J34.2 J39.2 J44.1 RP5.1
EA2: J30.P$2 J35.2 J40.2 J42.1 RP9.1
EA3: J31.P$2 J36.2 J41.2 J45.1 RP6.1
EA4: J27.P$2 J32.2 J37.2 J46.1 RP3.1
EA5: J14.P$2 J15.2 J16.2 J17.1 RT3.1
EA6: J21.1 J22.P$2 J23.2 J24.2 RT8.1
EA7: J18.2 J19.P$2 J20.1 RT6.1
EA8: J9.1 J12.2 J13.P$2 RT1.1
EB: J28.P$1 J33.3 J38.3 J43.4 RP2.1
EB1: J29.P$1 J34.3 J39.3 J44.4 RP8.1
EB2: J30.P$1 J35.3 J40.3 J42.4 RP10.1
EB3: J31.P$1 J36.3 J41.3 J45.4 RP7.1
EB4: J27.P$1 J32.3 J37.3 J46.4 RP4.1
EB5: J14.P$1 J15.3 J16.3 J17.4 RT4.1
EB6: J21.4 J22.P$1 J23.3 J24.3 RT7.1
EB7: J18.3 J19.P$1 J20.4 RT5.1
EB8: J9.4 J12.3 J13.P$1 RT2.1
EN_A: J10.3 J11.3 M1.2
EN_B: J10.1 J11.1 M1.5
ETH_CS: IC1.J1.5 M1.25 R27.2 SJ10.2 SJ10.3
ETH_INT: IC1.J1.6 M1.26
ETH_RST: M1.24 R26.2 SJ9.2 SJ9.3 U11.3
EXT_REF: C32.1 U10.11
GNDBB: J1.2 J5.2 J5.4 J6.2 J6.4 J7.2 J7.4 J8.2 J8.4 U5.19
IDX: J10.4 J11.4 M1.35/A16
INT_REF: C31.1 U10.10
MISO: IC1.J2.6 LCD1.9 LCD1.13 M1.12 U3.3 U10.7
MOSI: IC1.J1.3 LCD1.6 LCD1.12 M1.11 U3.5 U4.6 U10.4
N$1: J20.2 R18.1
N$2: J7.1 U5.23 U5.24
N$3: J9.2 R12.1
N$4: J21.2 R19.2
N$5: U1.5 U3.9
N$6: M1.36/A17 R9.2
N$7: R2.1 R3.1 U1.6
N$8: J17.2 R15.2
N$9: P2.2 U7.14
N$10: J5.1 U5.27 U5.28
N$11: P2.3 U7.17
N$12: C23.1 U7.1
N$13: U4.5 X1.3
N$14: J6.1 U5.25 U5.26
N$15: C25.1 U7.21
N$16: P1.3 U7.18
N$17: J8.3 U5.29 U5.30
N$18: J8.1 U5.21 U5.22
N$19: LED1.A R9.1
N$20: C7.1 U4.3
N$21: C26.2 U7.24
N$22: C6.1 U4.1
N$23: C26.1 U7.22
N$24: J43.2 R21.1
N$25: C21.1 U7.4
N$26: C21.2 U7.2
N$27: C24.1 U7.20
N$28: P1.2 U7.15
N$29: J42.2 R23.1
N$30: J5.3 U5.35 U5.36
N$31: C24.2 U7.6
N$32: J6.3 U5.33 U5.34
N$33: J46.2 R25.1
N$34: C13.+ R4.1
N$35: J45.2 R24.1
N$36: R4.2 U1.2 U3.13
N$37: C3.+ R2.2 U1.7
N$38: C9.+ U1.1 U3.11 U3.12
N$39: R10.2 U8.8
N$40: J7.3 U5.31 U5.32
N$41: J44.2 R22.1
N$42: RP15.2 X2.14
N$44: P3.3 U7.16
N$51: RP14.2 X2.13
N$52: IC1.J2.5 U11.2
N$53: RP20.2 X2.19
N$54: RP19.2 X2.18
N$55: RP18.2 X2.17
N$56: RP17.2 X2.16
N$57: RP16.2 X2.15
N$58: RP13.2 X2.12
N$59: RP12.2 X2.11
N$60: RP11.2 X2.9
N$61: RP21.2 X2.8
N$62: RP22.2 X2.7
N$63: RP23.2 X2.6
N$64: RP24.2 X2.5
N$65: RP25.2 X2.4
N$66: RP26.2 X2.3
P0: RP1.2 U10.19
P1: RP2.2 U10.20
P2: RP5.2 U10.21
P3: RP8.2 U10.25
P4: RP9.2 U10.27
P5: RP10.2 U10.28
P6: RP6.2 U10.30
P7: RP7.2 U10.31
P8: RP3.2 U10.32
P9: RP4.2 U10.33
P10: RP20.1 U10.35
P11: RP19.1 U10.36
P12: RP18.1 U10.37
P13: RP17.1 U10.40
P14: RP16.1 U10.42
P15: RP15.1 U10.43
P16: RP14.1 U10.45
P17: RP13.1 U10.46
P18: RP12.1 U10.47
P19: RP11.1 U10.1
PIN7: RT6.2 SJ1.3
PIN8: RT5.2 SJ2.3
PIN9: RT1.2 SJ3.3
PIN10: RT2.2 SJ4.3
PIN_3: RP26.1 SJ12.1
PIN_4: RP25.1 SJ11.1
PIN_18: M1.18/A4 RP24.1
PIN_20: M1.20/A6 RT8.2
PIN_27: M1.27 RP23.1
PIN_28: M1.28 RP22.1
PIN_39: M1.39/A20 RP21.1
PWR7_8: J18.1 SJ8.2
PWR9_10: J12.1 SJ5.2
PWR_P0-1: J33.1 J38.1 V1.2
PWR_P2-3: J34.1 J39.1 V2.2
PWR_P4-5: J35.1 J40.1 V3.2
PWR_P6-7: J36.1 J41.1 V4.2
PWR_P8-9: J32.1 J37.1 V5.2
PWRA0_A1: J15.1 J16.1 PWR-A0/A1.2
PWRPWM1_2: J23.1 J24.1 VPWM1.2
RX1: M1.0 U7.10
RX2: M1.9 SJ3.1 SJ3.2 SJ9.1 U7.11
RX3: M1.7 SJ1.1 SJ1.2 U7.12
RX3_232: P3.2 U7.13
SCL: LCD1.4 M1.37/A18 R20.2
SCLK: IC1.J1.4 LCD1.7 LCD1.10 M1.13 U3.4 U4.7 U10.5
SDA: LCD1.11 M1.38/A19 R16.2
SJ1: C9.- OUT.2 OUT.3 R5.1
SOL1: M1.23/A9 U5.6
SOL2: M1.22/A8 U5.7
SOL3: M1.17/A3 U5.8
SOL4: M1.16/A2 U5.9
SOL5: M1.A10 U5.10
SOL6: M1.A11 U5.11
SOL7: M1.A26 U5.12
SOL8: M1.A25 U5.13
SW1: LCD1.14 M1.32/A13
TFT_DC: LCD1.5 M1.21/A7
TFT_LED: LCD1.8 R17.2
TX1: M1.1 U7.7
TX2: M1.10 SJ4.1 SJ4.2 SJ10.1 U7.8
TX3: M1.8 SJ2.1 SJ2.2 U7.9
VBAT: M1.VBAT
VBB: J1.1A J1.1B U5.P$1
VIN: D1.C D2.A M1.VIN
VOUTB_1: C3.- R1.1
VUSB: M1.VUSB

## Tracks (layer width: path | path; a pad name or v marks a point on that pad's centre or on a via)
0.1
  Top 0.305: C22.1 35.05,58.29 35.56,57.78 35.56,56.29 U8.3
!CS_DDS  (via drill 0.38, 0.38 pad 0.61, 0.43)
  Top 0.254: U4.8 44.32,112.65 v44.2,112.39
  Top 0.305: v84.33,107.31 82.93,108.71 53.98,108.71 53.72,108.46 51.82,108.46 v51.69,108.58
  Top 0.406: v101.22,106.68 101.35,107.19 101.35,111 103.38,113.03 103.38,118.11 102.74,118.75 102.74,124.71 104.14,125.98 v106.05,125.98
  Bottom 0.305: 84.84,107.82 v84.33,107.31 | v51.69,108.58 46.61,108.58 44.45,110.74 44.45,112.14 v44.2,112.39
  Bottom 0.406: 84.84,107.82 98.68,107.82 99.82,106.68 v101.22,106.68 | v106.05,125.98 106.43,126.11 107.19,126.87 M1.19/A5
!CS_POT  (via drill 0.38, 0.43)
  Top 0.305: v34.16,120.14 34.42,120.14 34.54,120.27 35.99,120.27 U3.6 | 82.17,114.94 81.41,114.94 77.98,111.51 51.56,111.51 50.8,110.74 50.8,107.06 v50.55,106.81 | v44.96,107.82 42.29,110.49 31.88,110.49 v31.62,110.24
  Top 0.406: 94.74,88.77 M1.31/A12 93.09,88.77 91.57,90.3 91.57,102.62 90.42,103.76 90.42,114.43 89.92,114.94 82.17,114.94
  Bottom 0.305: v50.55,106.81 45.97,106.81 v44.96,107.82 | v31.62,110.24 31.62,117.6 32.26,118.24
  Bottom 0.406: 32.26,118.24 v34.16,120.14
!MAX_CS  (via drill 0.43)
  Top 0.254: 74.68,63.88 74.42,63.62 U10.6
  Top 0.406: 74.68,63.88 76.33,65.53 83.95,65.53 88.01,69.72 88.01,104.39 87.63,104.78 v87.63,112.78
  Bottom 0.406: v87.63,112.78 95.12,112.78 95.76,113.41 95.76,125.6 M1.6
!MAXCNVT  (via drill 0.43)
  Top 0.254: U10.9 72.92,65.42 73.41,65.91
  Top 0.406: 73.41,65.91 75.44,67.69 82.04,67.69 84.96,70.74 84.96,90.93 v85.09,91.06
  Bottom 0.406: v85.09,91.06 94.23,91.06 M1.30
!MAXINT  (via drill 0.43)
  Top 0.254: U10.8 73.42,64.4
  Top 0.305: 73.42,64.4 73.42,64.78 75.69,66.93
  Top 0.406: 75.69,66.93 82.42,66.93 86.23,70.74 86.23,92.96 v85.47,93.73
  Bottom 0.406: v85.47,93.73 94.36,93.73 M1.29
!TFT_CS  (via drill 0.3)
  Top 0.406: M1.15/A1 109.86,116.71 111,115.57 111,100.58 110.62,100.2 108.46,100.2 108.46,98.3 107.7,97.54 107.57,78.49 107.19,78.11 106.17,78.11 v105.54,78.99
  Bottom 0.406: v105.54,78.99 105.54,70.48 107.19,68.83 107.19,44.7 102.87,40.39 102.87,38.51 LCD1.3
+2V5A  (via drill 0.43)
  Top 0.305: U1.3 26.92,117.42 26.92,115.82 v26.54,115.44 23.37,115.44 22.48,114.55 22.48,111.51 21.21,110.24 C15.1 R6.2 20.83,108.46 22.1,108.46 R7.1
  Bottom 0.305: 26.92,115.82 v26.54,115.44
+3V3D  (via drill 0.3, 0.38 pad 0.61, 0.43)  (1 unrouted)
  Top 0.254: U10.3 75.92,62.2 v76.58,62.87 76.71,62.99 C33.1
  Top 0.305: U5.2 116.13,124 115.95,123.83 | C41.2 74.3,134.11 IC1.J2.3 | U11.4 70.87,117.4 | 70.74,117.4 70.3,117.4 R26.1 69.34,116.84 63.25,116.84 62.48,117.6 R27.1 | U7.3 35.06,84.7 35.43,84.33 37.21,84.33 37.72,83.82 38.51,83.82 C23.2
  Top 0.406: U5.3 U5.2 | 94.36,108.97 M1.3.3V3 | v76.58,68.71 76.83,68.71 77.09,68.45 81.53,68.45 82.55,69.47 82.55,76.83 | v90.55,102.23 90.55,82.3 v90.42,81.91 90.43,81.53 | 99.57,99.06 99.57,102.49 99.19,102.87 99.19,116.33 M1.3.3V_32 | 103.89,63.75 R16.1 107.31,63.37 v108.08,63.12 | v107.06,39.75 106.05,39.75 R20.1
  Top 0.61: v93.09,127.64 92.96,127.64 91.95,128.65 91.95,137.03 v92.08,137.16 91.95,137.54 91.95,139.83 92.96,140.84 95.63,140.84 95.76,140.97 99.82,140.97 101.22,139.57 M1.3.3V 113.28,139.57 v114.55,138.3 | 114.81,125.48 114.81,125.22 | 114.81,125.22 114.81,124.21 115.19,123.83 115.95,123.83 | v116.08,126.24 115.82,126.24 114.81,125.22 | IC1.J2.3 71.25,134.75 69.72,133.22 69.72,121.28 v69.6,121.16 | v71.63,118.24 70.87,117.4 70.74,117.4 | 82.55,76.83 82.55,82.3 v82.8,82.17 | v90.42,81.91 90.42,81.78 v90.42,81.92 90.55,81.79 90.55,76.33 90.93,75.95 92.2,75.95 96.01,72.14 96.01,66.8 96.39,66.42 96.39,66.29 103.25,66.29 103.89,65.66 103.89,63.75 | v73.41,68.71 66.55,68.71 65.66,69.6 52.32,69.47 50.29,71.5 50.29,85.72 50.42,85.85 v50.42,86.23 | v39.37,86.23 39.37,84.2 38.99,83.82 38.56,83.82 C23.2 | 94.36,108.97 93.09,110.24 93.09,115.95 v93.22,116.2
  Bottom 0.305: IC1.J2.2 IC1.J2.3
  Bottom 0.406: v76.58,62.87 v76.58,68.71 | v90.55,102.23 91.82,102.23 92.33,102.74 98.68,102.74 99.57,101.85 M1.3.3V4 | M1.3.3V_32 96.9,114.05 96.9,111.51 M1.3.3V3 | v108.08,63.12 108.08,44.45 106.17,42.55 106.17,40.51 v107.06,39.75
  Bottom 0.61: v93.09,127.64 93.09,117.86 93.22,117.73 v93.22,116.2 | v114.55,138.3 114.81,138.3 115.19,137.92 115.19,134.62 116.97,132.84 116.97,127.25 v116.08,126.24 | v69.6,121.16 69.6,120.27 v71.63,118.24 | v92.08,137.16 73.79,137.16 IC1.J2.2 | v82.8,82.17 90.17,82.17 v90.42,81.92 | v76.58,68.71 v73.41,68.71 | v50.42,86.23 46.23,86.23 | 41.78,86.23 v39.37,86.23
  Bottom 0.813: 41.78,86.23 46.23,86.23
+5VA
  Top 0.254: U10.15 U10.16 | U10.16 69.92,57.59 69.85,57.66 | U10.16 68.22,57.26 67.82,57.66 66.67,57.66 C37.1
  Top 0.61: R14.1 61.85,63.25 62.61,62.48 C35.1
  Top 0.813: C37.1 64.77,56.77 62.87,58.67 62.87,60.45 C35.1
+5VADDS  (via drill 0.43)
  Top 0.305: C1.1 24.51,126.49 U1.8 23.43,122.74 v23.37,122.68 | R28.1 24.13,114.17 v24,114.3 23.11,113.41 23.11,109.86 24.13,108.84 R7.2
  Bottom 0.305: v23.37,122.68 23.37,114.94 v24,114.3
+5VD  (via drill 0.3, 0.38, 0.43)
  Top 0.254: C6.2 45.09,116.71 44.83,116.97 44.83,118.06 U4.2 44.82,119.37 44.96,119.51 45.97,119.51 46.35,119.89 | v97.66,42.42 97.28,42.8
  Top 0.305: 46.61,119.25 46.35,119.51 46.35,119.89 46.35,123.98 X1.4 44.66,124.42 44.2,123.95 40.26,123.95 39.37,123.06 39.37,122.43 | U3.14 30.65,116.29 31.5,115.44 C8.2 31.75,115.44 30.99,114.68 C11.1 30.99,114.81 | 39.37,122.43 39.37,121.41 C4.1 | 39.12,122.17 39.37,122.43 | U3.2 35.78,117.7 35.43,117.35 33.78,117.35 32.77,118.36 | R28.2 26.04,112.27 24,112.27 23.62,111.89 23.62,110.62 24.26,109.98 28.7,109.98
  Top 0.406: J11.2 J10.2 | J2.1 84.15,137.03 | C8.2 32.13,117.73 32.77,118.36 32.77,120.9 33.91,122.05 38.99,122.05 39.12,122.17 | v120.78,41.4 120.27,41.4 | 46.86,116.59 46.86,115.7 C10.1
  Top 0.61: J11.2 137.67,98.55 | 82.68,128.27 v82.8,128.14 | VPWM1.1 124.46,32.26 124.08,32.89 124.08,37.34 v124.21,37.59 | R19.1 125.48,56.26 126.49,57.53 126.49,61.47 125.86,62.1 R15.1 | J10.2 139.83,98.55 141.48,96.77 141.48,90.04 137.03,87.12 | v62.23,103.38 62.23,106.17 | 62.23,106.17 63.12,107.06 v80.9,107.06 | 62.23,106.17 62.1,106.17 61.34,106.93 56.9,106.93 54.23,104.27 52.96,104.27 v52.83,104.39 | v43.18,106.43 40.13,106.3 | PS1.23 50.55,95.25 49.28,93.98 49.28,68.07 50.67,67.06 57.02,67.06 R14.2 | SJ5.1 19.05,78.11 v18.8,77.85 | v18.8,70.48 v19.56,70.48 | v27.18,70.1 27.3,70.1 27.69,69.72 | R17.1 106.81,49.66 106.55,49.4 v105.16,49.4 | v125.73,67.44 125.6,67.18
  Top 1.016: v82.8,127 v82.8,128.14 | 84.15,137.03 84.15,136.85 83.69,136.4 | v109.98,29.34 109.98,29.08 109.86,28.96 110.49,28.96 v110.87,28.57
  Top 1.27: 83.69,136.4 83.44,136.4 82.8,135.76 C12.1 82.8,128.65 | 82.8,128.65 v82.8,128.14 | D2.C D1.A 83.91,129.75 82.8,128.65
  Bottom 0.254: 102.74,43.18 98.42,43.18 v97.66,42.42
  Bottom 0.406: v120.78,41.4 123.7,41.4 124.21,40.89
  Bottom 0.61: v124.21,37.59 124.21,40.89 | PS1.23 PS1.22 57.78,95.38 61.21,95.38 61.98,96.14 61.98,103.12 v62.23,103.38 | v80.9,107.06 81.03,107.06 82.68,108.71 82.68,126.87 v82.8,127 | v52.83,104.39 45.09,104.27 v43.18,106.43 | v18.8,77.85 v18.8,70.48 | v19.56,70.48 20.07,70.48 20.45,70.1 v27.18,70.1 | v105.16,49.4 105.16,45.59 102.74,43.18 | X2.2 v125.73,67.44
  Bottom 1.016: v82.8,127 v82.8,128.14 | LCD1.1 107.57,31.75 109.86,29.46 | 109.86,29.46 v109.98,29.34 | v110.87,28.57 109.86,29.46
  pour Top (isolate 0.406, rank 3): -4.83,147.32 150.5,147.32 150.62,-4.19 -4.7,-4.19
+12VA  (via drill 0.3, 0.43, 0.7)
  Top 0.254: U10.26 71.92,50.84 71.5,50.42 | U10.39 80.04,54.26 80.32,53.98 80.64,53.98
  Top 0.406: v69.47,50.8 69.72,50.8 70.1,50.42 71.5,50.42 | 82.3,52.07 81.66,51.44 v81.15,51.44 | C18.1 59.18,97.54 v58.55,98.17 | v81.66,53.98 80.64,53.98
  Top 0.61: 82.3,52.07 C39.1 82.42,53.34 81.79,53.98 v81.66,53.98 | C40.1 v69.47,50.8 | C18.1 62.61,97.54 C19.1 65.23,98.3 U6.1 65.46,98.09 65.53,98.17 65.53,95.5 65.79,95.25 69.72,95.25 71.25,93.73 77.72,93.73 81.66,89.79 81.66,78.23 81.15,77.6 v81.15,69.6 | v81.28,61.85 83.69,61.85 | 85.72,50.42 84.33,49.02 81.66,49.02 80.9,49.66 80.9,50.67 v81.15,51.44
  Bottom 0.61: v69.47,50.8 69.47,52.96 69.85,53.34 70.99,53.34 73.15,51.18 80.77,51.18 v81.15,51.44 | v81.15,69.6 81.15,61.98 v81.28,61.85 81.28,61.47 82.17,60.58 82.17,54.48 v81.66,53.98
+15V  (via drill 0.3, 0.38, 0.43)
  Top 0.406: 23.11,48.9 22.35,48.9 SJ8.3
  Top 0.61: V1.3 24.38,21.46 v24.26,21.59 v24.26,29.08 | v51.05,21.59 51.05,19.18 V2.3 | v103.63,21.72 103.63,19.18 V4.3 | V5.3 129.54,19.18 v129.54,21.72 127.38,21.72 v125.22,24 | R8.1 68.63,98.3 U6.3 | 21.21,48.77 SJ8.3 | VPWM1.3 v125.22,36.83 | v124.33,43.43 124.33,69.22 122.94,70.87 v122.81,73.28 | 123.83,79.76 v123.95,79.88 124.21,80.14 125.98,80.14 PWR-A0/A1.3 | v25.4,80.14 25.4,69.09 25.65,68.71 25.65,50.29 v24.26,48.9 22.35,48.9 | v18.29,80.14 18.29,80.39 19.18,81.28 20.57,81.28 SJ5.3 | PS1.14 83.82,89.41 v83.82,83.69 | v101.6,75.95 101.6,76.2 94.49,83.31 92.2,83.31 v91.95,83.57 | v76.96,21.59 76.96,19.05 V3.3 77.09,21.46 v76.96,21.59
  Top 0.813: PS1.14 C20.1 74.55,97.66 C17.1 71.63,97.66 70.99,98.3 R8.1
  Bottom 0.61: v24.26,21.59 v51.05,21.59 v76.96,21.59 103.5,21.59 v103.63,21.72 v129.54,21.72 | v125.22,24 v125.22,36.83 125.35,42.42 v124.33,43.43 | v24.26,29.08 v24.26,48.9 | v122.81,73.28 122.94,78.87 v123.95,79.88 121.41,79.88 121.03,80.26 111,80.26 110.24,81.03 102.49,81.03 102.11,80.64 102.11,76.45 v101.6,75.95 | v25.4,80.14 v18.29,80.14 | v83.82,83.69 91.82,83.69 v91.95,83.57
-12VA  (via drill 0.3, 0.43, 0.64, 0.7)
  Top 0.254: U10.24 69.92,52.89 v70.48,52.32 | U10.34 75.92,50.07 76.33,49.66 v76.71,49.66 | U10.41 81.55,55.26 82.04,55.24 83.19,55.24 v83.57,54.86 | U10.29 73.42,49.54 v73.15,49.15 | U10.48 78.59,58.93 | v81.15,57.02 80.76,56.76 U10.44
  Top 0.305: v71.68,66.44 72.53,66.44 76.07,69.98 78.11,69.98 78.36,70.23
  Top 0.61: U9.3 75.26,72.57 75.69,72.14 76.71,72.14 C28.2 76.96,72.26 77.72,71.5 78.99,71.5 | 78.99,71.5 C27.2 | 78.99,71.5 78.99,70.87 v79.88,69.47 | v81.92,50.42 82.8,50.42 83.57,51.18 v83.57,52.83 | 78.59,58.93 79.12,59.46 | 79.12,59.46 v79.76,59.56 | 79.12,59.46 79.35,59.69 C34.1 | v83.57,54.86 84.45,54.86 C38.1 | v83.31,57.02 v81.15,57.02
  Top 1.016: 78.36,70.23 78.99,70.87
  Bottom 0.254: v70.48,52.32 70.23,52.32 70.48,52.58 | v73.15,49.15 73.15,49.66 72.64,50.16
  Bottom 0.61: v70.48,52.32 72.64,50.16 76.07,50.16 v76.71,49.66 76.71,49.78 76.83,50.04 77.09,50.29 81.41,50.29 v81.92,50.42 | v79.88,69.47 79.88,60.07 v79.76,59.56 79.12,59.46 78.92,59.26 | v81.15,57.02 78.92,59.26 | 78.79,59.13 78.92,59.26 | v83.57,52.83 v83.57,54.86 83.31,55.12 v83.31,57.02
-15V
  Top 0.406: R13.2 69.98,73.15
  Top 0.61: 69.47,73.79 R13.2 70.1,73.28 71.25,74.42 72.9,74.42 | 72.9,74.42 73.66,73.66 U9.2 | PS1.11 77.98,78.61 72.9,74.42
  pour Top (isolate 0.406): 48.9,69.72 48.51,88.27 85.6,88.27 85.6,69.22
A0  (via drill 0.43)
  Top 0.406: v107.57,113.54 103.38,109.35 103.38,102.62 103.25,102.49 103.25,98.42 104.9,96.77 104.9,81.15 104.39,80.64 v104.39,79.5 | RT7.2 124.71,29.34 123.19,30.86 123.32,67.44 120.02,71.5 113.28,71.5 110.62,74.17 v104.39,74.17
  Bottom 0.406: v107.57,113.54 108.2,114.17 M1.14/A0 | v104.39,74.17 v104.39,79.5
A14
  Top 0.406: RT3.2 124.84,74.68 121.67,77.85 117.73,77.85 116.08,79.5 SJ6.2 SJ6.3 114.81,81.15 M1.33/A14
A15
  Top 0.406: RT4.2 124.46,73.15 121.03,76.58 117.98,76.58 116.71,75.31 116.71,74.68 116.33,74.3 SJ7.2 SJ7.3 113.28,75.82 111.25,77.85 108.84,77.85 108.46,78.23 108.46,87 109.73,88.27 M1.34/A15
AGND  (via drill 0.43, 0.6, 0.64 pad 0.43)
  Top 0.254: v79.76,52.58 79.76,53.34 79.34,53.76 U10.38 76.42,53.76 v76.07,54.1 | U10.18 U10.17 | 45.85,114.94 45.09,114.94 44.82,114.67 U4.9 44.82,114.8 44.96,114.94 v44.45,115.44 | U10.17 67.32,56.76 C37.2 | U10.18 67.95,56.26 67.44,56.77 | U10.18 72.01,56.26 v72.26,56.01 72.39,56.13 72.39,56.64 72.28,56.76 U10.17 | C40.2 69.6,49.28 v69.72,49.4
  Top 0.305: 21.59,127 21.72,126.87 C1.2 21.46,126.87 v21.34,126.75 | C15.2 18.41,110.24 v17.91,109.73 18.8,108.84 R6.1 | U1.4 28.32,115.82 28.07,115.82 v28.19,115.57 | U3.8 30.65,121.84 v30.73,121.92 | C16.2 13.56,120.75 v13.08,120.78 | C2.2 13.64,125.04 v13.72,124.97 | C18.2 61.34,101.09 v60.45,101.98
  Top 0.406: C39.2 v79.76,52.58 | C38.2 85.98,54.36 85.47,53.85 v84.84,53.72 | 69.47,49.28 v69.72,49.4 | v69.34,101.22 71.37,101.22 71.75,101.47 | R3.2 v35.81,126.62 | v105.92,138.18 105.47,137.73 | 105.47,137.73 C5.2 | U2.2 102.94,137.73 105.47,137.73 | 100.97,118.49 100.97,115.06 100.84,114.94 | v93.73,130.68 95.89,130.68 97.16,129.41 v98.42,129.41 | 45.85,114.94 45.85,114.55 46.35,114.05 C10.2
  Top 0.61: U9.1 72.16,71.91 71.75,71.5 70.23,71.5 R13.1 v70.1,70.1 | R8.2 69.34,100.84 | C34.2 v83.95,59.69 | C27.1 v79.12,76.45 | C28.1 v76.83,75.06 | C29.1 65.15,70.74 v65.28,70.61 | C30.1 68.2,70.61 v68.96,69.72 | C31.2 v65.41,68.45 | 100.84,114.94 100.84,112.9 100.33,112.39 100.33,108.33 | v60.45,101.98 60.45,105.16 59.94,105.66 57.15,105.66 54.74,103.25 v51.94,103.25 | C20.2 77.47,99.69 81.15,103.38 81.15,104.39 v82.3,105.54 | v84.58,127 90.04,127 v90.3,127.25
  Top 0.813: 74.93,95.5 PS1.16 | C20.2 74.04,100.71 C17.2 71.75,100.71 71.12,100.08 R8.2 | M1.AGND 109.86,142.11 | C32.2 v64.14,63.12 | C36.2 64.39,60.71 v64.26,60.58 | C35.2 v59.56,59.18 | U2.2 101.54,135.7 100.71,134.87 v100.71,128.78 100.71,118.75 100.97,118.49
  Bottom 0.254: v79.76,52.58 80.01,52.7 | v44.45,115.44 44.2,115.95 43.94,115.7
  Bottom 0.305: v21.34,126.75 21.46,126.75 | v17.91,109.73 17.91,109.6 17.78,109.47 | v28.19,115.57 27.81,115.19 | v30.73,121.92 30.35,121.92 30.23,121.79 | v13.08,120.78 13.08,120.65 12.95,120.52 | v13.72,124.97 13.72,124.46 | v60.45,101.98 60.2,101.73
  Bottom 0.406: v69.72,49.4 69.6,49.4 69.47,49.28 | 69.47,102.36 69.49,102.42 69.34,101.47 71.25,101.47 v69.34,101.22 | v35.81,126.62 35.81,126.49 35.56,126.24 | M1.AGND 109.73,141.99 v105.92,138.18 | v98.42,129.41 100.08,129.41 v100.71,128.78
  Bottom 0.61: v83.95,59.69 83.69,59.44 83.57,59.44 | v79.12,76.45 79.12,76.2 78.87,75.95 | v76.83,75.06 76.58,75.06 | v65.28,70.61 65.28,70.48 64.9,70.1 | v68.96,69.72 66.93,69.22 66.8,69.09 | v70.1,70.1 70.1,69.85 69.98,69.72 | v65.41,68.45 64.9,68.2 64.64,67.94 | v51.94,103.25 44.58,103.25 41.02,107.06 39.62,107.19 37.34,109.47 | v82.3,105.54 82.3,106.68 83.69,108.08 83.69,126.11 v84.58,127 | v90.3,127.25 91.06,127.25 92.84,129.03 92.84,129.79 v93.73,130.68
  Bottom 0.813: v64.14,63.12 64.14,62.48 | v64.26,60.58 63.88,60.2 | v59.56,59.18 59.56,58.93 59.44,58.8
  other vias: 74.17,56.01 74.17,57.91 76.07,57.91 76.07,56.01 74.17,54.1 72.26,54.1 72.26,57.91
  pour Bottom (isolate 0.508, rank 2): 13.21,-0.13 12.95,31.5 60.07,31.75 59.69,106.17 84.71,106.17 85.09,23.88 137.03,23.88 137.29,-0.76
  pour Top (isolate 0.406): 85.09,108.58 84.84,89.53 49.02,89.66 49.02,108.58
  pour Bottom (isolate 0.381): 7.49,146.81 7.49,128.65 12.57,128.78 12.57,107.31 47.12,106.93 46.99,116.33 38.86,116.33 38.86,147.19
AREF
  Top 0.406: M1.AREF 105.92,135.76 C5.1 103.53,135.76 U2.1
CANH
  Top 0.305: U8.7 R11.1 36.2,45.34 36.2,44.32 35.43,43.56 34.29,43.56 18.03,27.3 18.03,23.75 14.99,20.83 14.1,20.83 8.51,15.24 4.63,15.24 J26.1
  Top 0.406: R11.1 36.7,45.72
CANL
  Top 0.305: U8.6 35.31,46.23 R11.2 34.8,45.21 17.4,27.81 17.53,24.13 14.73,21.46 13.84,21.46 8.89,16.51 3.81,16.51 3.05,15.75 3.05,14.2 J26.2
  Top 0.406: 34.92,45.59 R11.2
CANRX  (via drill 0.38, 0.43)
  Top 0.254: SJ11.2 33.4,63.25 SJ11.3
  Top 0.305: v53.47,107.44 47.62,101.73 47.62,81.15 33.27,66.8 32.64,66.8 31.62,65.79 31.62,64.14 32.51,63.25 33.4,63.25 | v53.72,116.97 53.72,120.27 56.01,122.56 56.01,131.32 63.12,138.43 72.9,138.43 73.03,138.56 74.3,138.56 75.82,137.03 v75.82,135.13
  Top 0.61: U8.4 34.04,57.28 33.4,57.91 SJ11.3
  Bottom 0.305: v53.47,107.44 53.47,107.7 53.72,107.95 v53.72,116.97 | v75.82,135.13 76.07,135.38 91.31,135.38 M1.4
CANTX  (via drill 0.38, 0.43)
  Top 0.254: SJ12.2 SJ12.3
  Top 0.305: v54.99,107.82 48.26,101.09 48.26,80.77 36.32,68.83 36.32,63.88 36.83,63.37 SJ12.2 | v54.99,117.09 54.99,120.52 56.52,122.05 56.52,130.81 61.72,136.02 v74.8,136.02
  Top 0.61: U8.1 37.85,57.02 38.35,57.53 SJ12.3
  Bottom 0.305: v54.99,107.82 55.12,108.08 54.61,108.58 54.61,116.59 v54.99,117.09 | v74.8,136.02 92.96,136.02 M1.3
DAC0  (via drill 0.38, 0.43)
  Top 0.305: v31.88,119.76 31.75,119.63 30.67,119.63 U3.10
  Top 0.406: v105.66,97.41 105.92,96.9 105.92,80.77 v105.54,80.01 | SJ6.1 114.81,78.11 113.41,78.11 111.51,80.01 v109.47,80.01 | M1.A14/DAC_32 107.19,116.33 108.46,115.06 108.46,105.28 M1.A21 | v85.98,97.79 85.98,103.25 81.28,107.95 56.39,107.95 v53.98,105.54 | v44.7,106.68 43.94,107.31 41.4,109.86 33.02,109.86 32.26,109.09 31.11,109.09 v30.23,109.98
  Bottom 0.406: v105.66,97.41 106.05,97.79 106.05,100.33 108.97,103.25 | 108.97,103.25 M1.A21 | 108.97,103.25 101.98,103.25 100.97,102.23 100.97,98.3 100.08,97.41 95.63,97.41 95.38,97.66 86.11,97.66 v85.98,97.79 | v109.47,80.01 v105.54,80.01 | v53.98,105.54 45.85,105.54 v44.7,106.68 | v30.23,109.98 30.23,110.36 30.73,110.87 30.73,118.49 v31.88,119.76
DAC0_OUT
  Top 0.305: C2.1 16.26,126.82 R1.2 17.2,127.94 16.64,128.4 16.64,132.72 J4.P$1 26.17,134.11 J3.2
DAC1  (via drill 0.43)
  Top 0.305: 95.89,92.46 95.89,94.23 95,95.12 93.47,95.12 92.58,96.01 92.58,99.44 v93.34,100.2
  Top 0.406: v97.03,101.47 v97.03,104.14 | 95.89,92.58 95.89,92.46 96.14,82.93 103.12,75.82 104.65,75.82 105.54,74.93 111.51,74.93 113.67,72.77 SJ7.1
  Bottom 0.305: v93.34,100.2 95.76,100.2 v97.03,101.47
  Bottom 0.406: v97.03,104.14 105.28,104.14 107.7,106.55 M1.A22
DAC_REF
  Top 0.254: U10.12 70.3,60.26 70.23,60.33
  Top 0.813: C36.1 69.85,60.71 70.23,60.33
DDS  (via drill 0.43)
  Top 0.254: U4.10 45.32,112 44.96,111.63 39.5,111.63 38.99,112.14 39.39,112.14 C13.-
  Top 0.305: 38.99,112.14 38.23,112.14 37.34,111.25 v24.77,111.25 | v17.91,111.25 17.4,111.25 16.38,110.24 OUT.1
  Bottom 0.305: v24.77,111.25 v17.91,111.25
DDS_OUT
  Top 0.305: R5.2 16.18,120.73 C16.1 16.2,122.22 14.86,123.57 13.46,123.57 12.45,124.59 12.45,127.89 13.08,128.52 14.61,128.52 15.11,129.16 15.11,131.44 J4.P$2 13.72,133.22 13.72,134.87 14.35,135.51 25.15,135.51 26.8,137.16 28.96,137.16 30.48,135.64 35.7,135.64 J3.3
DGND  (via drill 0.43, 0.64)
  Top 0.254: U10.2 76.42,61.43 76.83,61.85 77.72,61.85 78.87,61.85 79.12,62.1 79.12,62.87 C33.2 | U4.4 43.82,117.23 43.69,117.09 42.93,117.09 42.29,117.73 42.29,119 v40.77,120.52 | 93.47,144.65 94.36,144.65 94.49,144.78
  Top 0.305: C11.2 33.4,113.41 33.66,113.67 | X1.2 41.6,121.47 v41.02,121.79 | U3.7 37.67,120.95 38.86,119.76 39.5,119.76 C4.2 39.75,119.51 | U3.1 v36.4,116.25 36.45,115.95 | U5.15 114.79,115.55 v113.79,115.57 | LED1.C 120.11,99.47 v120.14,99.44 | C22.2 U8.2 v36.58,60.58 | C25.2 33.17,76.35 v32.64,76.33 32.64,78.11 33.14,78.6 U7.19 | U7.23 v35.7,81.52 v35.69,81.53 | U7.5 33.78,87 v33.4,87.63 | C41.1 74.04,132.59 IC1.J2.4 | U11.1 75.34,117.57 v76.07,117.6
  Top 0.406: J10.5 J11.5 | J2.5 80.95,136.7 80.77,136.65 | U5.5 U5.4 114.83,122.7 v114.94,122.68 | M1.GND6 101.73,98.55 101.73,96.9 102.87,95.76 v102.87,90.81 | 93.47,144.65 92.96,145.16 91.31,145.16 v89.28,143.13
  Top 0.61: 77.72,61.85 v77.47,61.72 | v70.99,62.48 69.85,63.63 69.85,64.52 69.72,64.52 69.34,64.9 64.26,64.9 v63.88,64.52 | v104.78,109.35 104.65,108.71 v104.65,105.03 104.65,102.87 104.39,102.62 v104.39,101.98 | C7.2 39.75,118.36 v39.75,118.24 39.62,118.49 C4.2 | 39.75,119.51 v40.77,120.52 | 79.12,62.87 79.63,62.87 79.88,63.12 v86.87,63.12 | JP1.1 143.76,11.94 JP1.2 144.02,14.48 JP1.3 143.76,17.27 143.51,17.53 143.76,17.53 JP1.4 | R10.1 v40.89,44.7 | C14.2 78.99,128.27 v78.87,128.14 | C12.2 78.74,130.3 v78.61,130.18 | 33.66,113.67 v34.04,113.92 | C8.1 33.66,116.46 v33.53,116.59
  Top 1.016: 80.9,132.33 80.77,132.33 80.39,132.33 79.63,131.57 79.63,130.43 C12.2
  Top 1.27: 80.77,132.33 v80.77,132.72 v80.77,133.99 80.77,136.65
  Bottom 0.305: v40.77,120.52 40.89,120.52 40.77,120.27 | v113.79,115.57 113.79,115.06 | v120.14,99.44 120.14,99.19 | 95.5,135.64 95.5,136.02 96.14,136.65 96.14,137.79 95.63,138.3 92.84,138.3 92.58,138.56 92.58,140.21 93.09,140.72 93.34,140.72 93.6,140.97 93.6,140.84 96.39,140.84 96.52,140.72 | v36.58,60.58 36.96,60.71 37.21,60.33 | v32.64,76.33 33.15,76.2 | v35.69,81.53 35.56,81.53 35.43,81.41 | v33.4,87.63 33.15,87.5 33.02,87.38 | v76.07,117.6 75.56,116.97 75.31,116.71
  Bottom 0.406: 81.28,132.72 81.15,132.59 80.52,132.59 | 113.03,122.68 v114.94,122.68 113.41,122.58 113.03,122.56 111.89,123.7 111.89,125.98 115.95,130.05 115.95,132.46 114.43,133.99 111.76,133.99 110.36,133.35 105.28,133.35 105.41,134.11 | M1.GND1 111.12,107.7 111.51,107.7 111.12,107.31 111.12,105.92 110.49,105.28 108.71,105.28 | 102.11,101.47 M1.GND6 | v102.87,90.81 102.74,91.31 | 102.74,91.31 102.62,91.19 102.62,91.06 | 96.27,131.95 96.27,134.87 95.5,135.64 95.38,135.76 | 102.74,91.31 102.74,89.41 101.85,88.52 | v89.28,143.13 89.03,142.88 | 34.42,113.92 34.67,113.92 36.32,115.57 36.32,116.17 v36.4,116.25 37.13,116.25 38.99,118.11 39.75,118.11 v39.75,118.24 39.75,118.49
  Bottom 0.61: 124.21,107.06 120.4,105.79 120.4,102.36 132.08,92.71 132.08,91.06 132.21,90.93 J10.5 | v77.47,61.72 75.95,61.72 75.06,62.48 v70.99,62.48 | M1.GND1 108.71,109.09 v104.65,105.03 | v104.78,109.35 104.78,109.47 | v104.39,101.98 104.39,102.23 104.27,102.11 | v86.87,63.12 86.87,63.25 87.12,62.87 | 101.85,88.52 101.85,88.27 102.11,88.01 | v113.79,115.57 113.67,115.57 113.67,118.11 114.3,118.75 114.3,121.69 113.41,122.58 | JP1.4 144.02,28.13 J24.4 | v63.88,64.52 62.23,64.52 61.72,65.02 57.4,69.47 56.01,70.87 | v78.87,128.14 78.87,128.02 78.61,127.76 | v78.61,130.18 78.36,130.18 78.11,129.92 | 33.02,113.67 33.27,113.92 v34.04,113.92 34.42,113.92 | 33.4,116.59 v33.53,116.59 33.86,116.25 v36.4,116.25
  Bottom 0.813: M1.GND3 97.54,130.68 96.27,131.95 | P1.5 10.59,108.76 8.64,106.81
  Bottom 1.27: v80.77,133.99 80.77,133.86 80.64,134.11 80.26,133.86 v80.77,132.72
  pour Bottom (isolate 0.508, rank 2): -2.79,148.97 73.41,148.34 76.58,148.46 114.05,148.21 114.05,107.57 131.44,107.7 131.44,104.52 148.97,104.52 148.72,89.03 148.46,-1.91 140.34,-1.91 140.08,24.89 86.23,25.02 86.11,107.44 58.55,107.44 59.05,33.53 11.81,33.78 11.94,-0.51 -1.78,-0.64
EA
  Top 0.406: J38.2 27.41,9.12 J33.2 | J43.1 12.19,11.81 13.84,13.46 13.84,16.26 14.22,16.64 17.14,16.64 18.8,18.29 | 18.8,18.29 RP1.1 | J28.P$2 26.16,14.35 24.51,16 21.08,16 18.8,18.29
  Bottom 0.406: J33.2 27.43,9.27 28.83,10.67 28.83,11.56 J28.P$2
EA1
  Top 0.406: J39.2 53.7,9.12 J34.2 | J29.P$2 52.45,14.35 51.18,15.62 48.26,15.62 RP5.1 41.53,18.03 40.13,16.64 40.13,13.59 38.99,12.45 38.36,11.81 J44.1
  Bottom 0.406: J34.2 53.72,9.4 54.86,10.54 54.86,11.81 J29.P$2
EA2
  Top 0.406: J40.2 79.99,9.12 J35.2 | J30.P$2 78.74,14.73 77.72,14.73 77.09,15.37 73.66,15.37 RP9.1 69.6,16.89 67.18,16.89 66.42,15.75 66.42,13.59 64.77,11.94 J42.1
  Bottom 0.406: J30.P$2 78.87,14.22 80.26,12.83 80.26,9.4 J35.2
EA3
  Top 0.406: J41.2 106.28,9.12 J36.2 | J31.P$2 105.03,14.48 103.76,15.75 99.19,15.75 RP6.1 94.23,18.29 92.71,16.76 92.71,13.72 92.33,13.34 92.08,13.34 90.81,12.06 90.18,12.06 J45.1
  Bottom 0.406: J36.2 106.3,9.4 107.44,10.54 107.44,11.81 J31.P$2
EA4
  Top 0.406: J37.2 132.57,9.25 J32.2 | J27.P$2 131.32,13.97 130.3,12.95 126.36,12.95 122.94,16.38 122.94,17.27 | 122.94,17.27 122.94,18.41 RP3.1 | J46.1 116.97,11.81 119,13.59 119,15.75 119.63,16.38 122.05,16.38 122.94,17.27
  Bottom 0.406: J32.2 132.59,9.4 133.1,9.78 133.1,12.32 J27.P$2
EA5
  Top 0.406: RT3.1 127.51,74.68 J14.P$2 133.99,81.15 135.38,81.15 136.4,80.14 J15.2 142.75,80.14 J16.2 144.02,78.59 144.02,68.33 142.88,67.18 137.16,67.18 136.27,66.29 136.27,65.66 134.75,64.14 J17.1
EA6
  Top 0.406: J23.2 142.73,34.42 J24.2 | J21.1 135.26,44.2 136.4,45.21 141.48,45.21 143.13,43.69 143.13,39.37 144.15,38.23 144.15,35.54 J24.2 | RT8.1 137.03,27.3 138.3,26.29 142.62,26.29 144.15,27.81 144.15,33 J24.2
  Bottom 0.406: J23.2 132.72,34.42 J22.P$2
EA7
  Top 0.406: RT6.1 16,50.16 16,48.13 J19.P$2 12.7,44.83 4.06,44.83 J18.2 2.29,44.07 2.29,40.77 3.43,39.62 3.43,33.15 2.79,32.51 2.79,28.96 4.06,27.69 6.86,27.69 7.49,28.32 J20.1
EA8
  Top 0.406: J13.P$2 12.57,84.71 6.22,84.71 5.46,85.47 J12.2 2.92,85.47 2.03,84.58 2.03,80.52 4.95,77.6 5.46,77.6 7.24,75.82 8.64,75.82 10.03,74.42 12.72,74.42 14.15,72.99 | J9.1 13.34,69.6 13.34,72.14 14.15,72.99 | 14.15,72.99 16.51,75.44 RT1.1
EB
  Top 0.406: RP2.1 21.21,18.16 21.97,17.4 25.15,17.4 27.56,14.99 27.56,13.08 J28.P$1 24.89,10.41 | 24.89,10.41 J33.3 24.91,9.12 J38.3 | J43.4 17.91,14.35 20.83,11.43 23.88,11.43 24.89,10.41
EB1
  Top 0.406: J29.P$1 53.72,12.95 53.72,15.37 52.45,16.64 49.66,16.64 RP8.1 | J34.3 51.18,9.65 | 51.18,9.65 51.18,10.41 J29.P$1 | J39.3 51.2,9.63 51.18,9.65 | J44.4 46.1,14.35 48.64,11.81 52.32,11.81 J29.P$1
EB2
  Top 0.406: RP10.1 73.28,18.16 74.55,16.89 77.09,16.89 77.98,16 79.25,16 79.88,15.37 79.88,12.83 J30.P$1 | J30.P$1 78.74,10.41 J35.3 77.47,3.45 J40.3 | J42.4 70.74,14.48 73.28,11.94 78.49,11.94 J30.P$1
EB3
  Top 0.406: J31.P$1 105.03,10.41 J36.3 103.78,9.12 J41.3 | RP7.1 100.2,16.76 105.03,16.76 106.3,15.49 106.3,12.95 J31.P$1 | J45.4 97.28,14.35 99.95,11.68 J31.P$1
EB4
  Top 0.406: RP4.1 126.11,18.54 127.76,16.89 130.56,16.89 132.59,14.86 132.59,13.08 J27.P$1 | J27.P$1 131.32,10.54 J32.3 130.07,9.25 J37.3 | J46.4 120.14,14.35 122.81,11.68 J27.P$1
EB5
  Top 0.406: RT4.1 131.44,72.52 | 131.44,72.52 132.72,73.91 134.37,75.82 134.37,78.74 | 134.37,78.74 J14.P$1 | 134.37,78.74 136.27,78.74 J15.3 142.73,77.6 J16.3 | J17.4 131.7,72.77 131.44,72.52
EB6
  Top 0.406: J22.P$1 135.38,31.75 136.91,31.75 J23.3 137.05,31.9 J24.3 | RT7.1 127.25,29.34 129.79,31.88 132.72,31.88 J22.P$1 | J21.4 131.83,48 J21.4 131.44,47.88 132.84,46.74 132.84,44.58 131.57,43.56 131.57,38.23 134.11,35.69 134.11,33.27 J22.P$1
EB7  (via drill 0.38)
  Top 0.406: RT5.1 16.89,53.72 16.89,52.96 15.37,51.44 13.97,51.44 12.19,49.66 12.19,46.86 J19.P$1 11.81,46.61 11.18,45.97 5.33,45.97 J18.3 | J20.4 14.22,25.27 12.45,27.05 3.3,27.05 2.03,28.32 2.03,38.86 v2.41,39.37
  Bottom 0.406: v2.41,39.37 2.29,39.75 2.29,46.74 J18.3
EB8  (via drill 0.38)
  Top 0.406: J12.3 5.08,88.01 6.99,85.85 11.3,85.85 J13.P$1 | J9.4 15.75,64.27 17.02,65.53 17.02,69.34 | 17.02,69.34 17.02,71.75 RT2.1 | 17.02,69.34 16,68.33 13.84,68.33 12.7,67.18 12.7,66.8 12.57,66.67 10.92,66.67 10.41,67.18 4.19,67.18 2.41,68.96 2.41,78.23 v2.16,78.49
  Bottom 0.406: v2.16,78.49 2.16,86.87 J12.3
EN_A  (via drill 0.43)
  Top 0.406: J11.3 J10.3 128.02,96.01 126.24,94.23 113.92,94.23 v111.25,91.57 | v100.71,93.09 100.71,94.61 98.3,97.03 98.3,126.36 99.69,127.64 99.69,130.3 98.93,131.06 98.93,139.06 98.17,139.83 96.9,139.83 96.14,139.06 96.14,138.68 M1.2
  Bottom 0.406: v100.71,93.09 107.31,93.09 108.58,91.82 108.58,90.81 109.22,90.17 110.87,90.17 111.25,90.68 v111.25,91.57
EN_B  (via drill 0.43)
  Top 0.305: 97.28,126.62 97.28,127 94.87,129.41 M1.5
  Top 0.406: J11.1 J10.1 131.57,101.09 125.48,95 112.9,95 v110.49,92.58 | v99.82,94.11 99.57,94.49 95.89,98.17 95.89,118.62 97.28,120.02 97.28,126.62
  Bottom 0.406: v99.82,94.11 107.57,94.11 109.09,92.58 v110.49,92.58
ETH_CS  (via drill 0.43)
  Top 0.305: 94.11,104.01 91.69,106.43 91.69,115.82 v91.19,116.33 | v90.55,125.22 75.31,125.22 v74.17,124.08 | v68.58,124.08 68.58,122.43 67.06,120.9 62.99,120.9 62.23,120.14 R27.2 | SJ10.2 SJ10.3 | SJ10.2 59.56,118.36 60.71,119.51 | SJ10.2 58.17,121.03 57.4,121.79 v57.4,129.54
  Top 0.406: 60.71,119.51 62.1,119.51 R27.2 | 94.11,104.01 M1.25